# EAGLE board Sprite_Sail_60x60cm (EAGLE 9.0.0), part 1 of 2
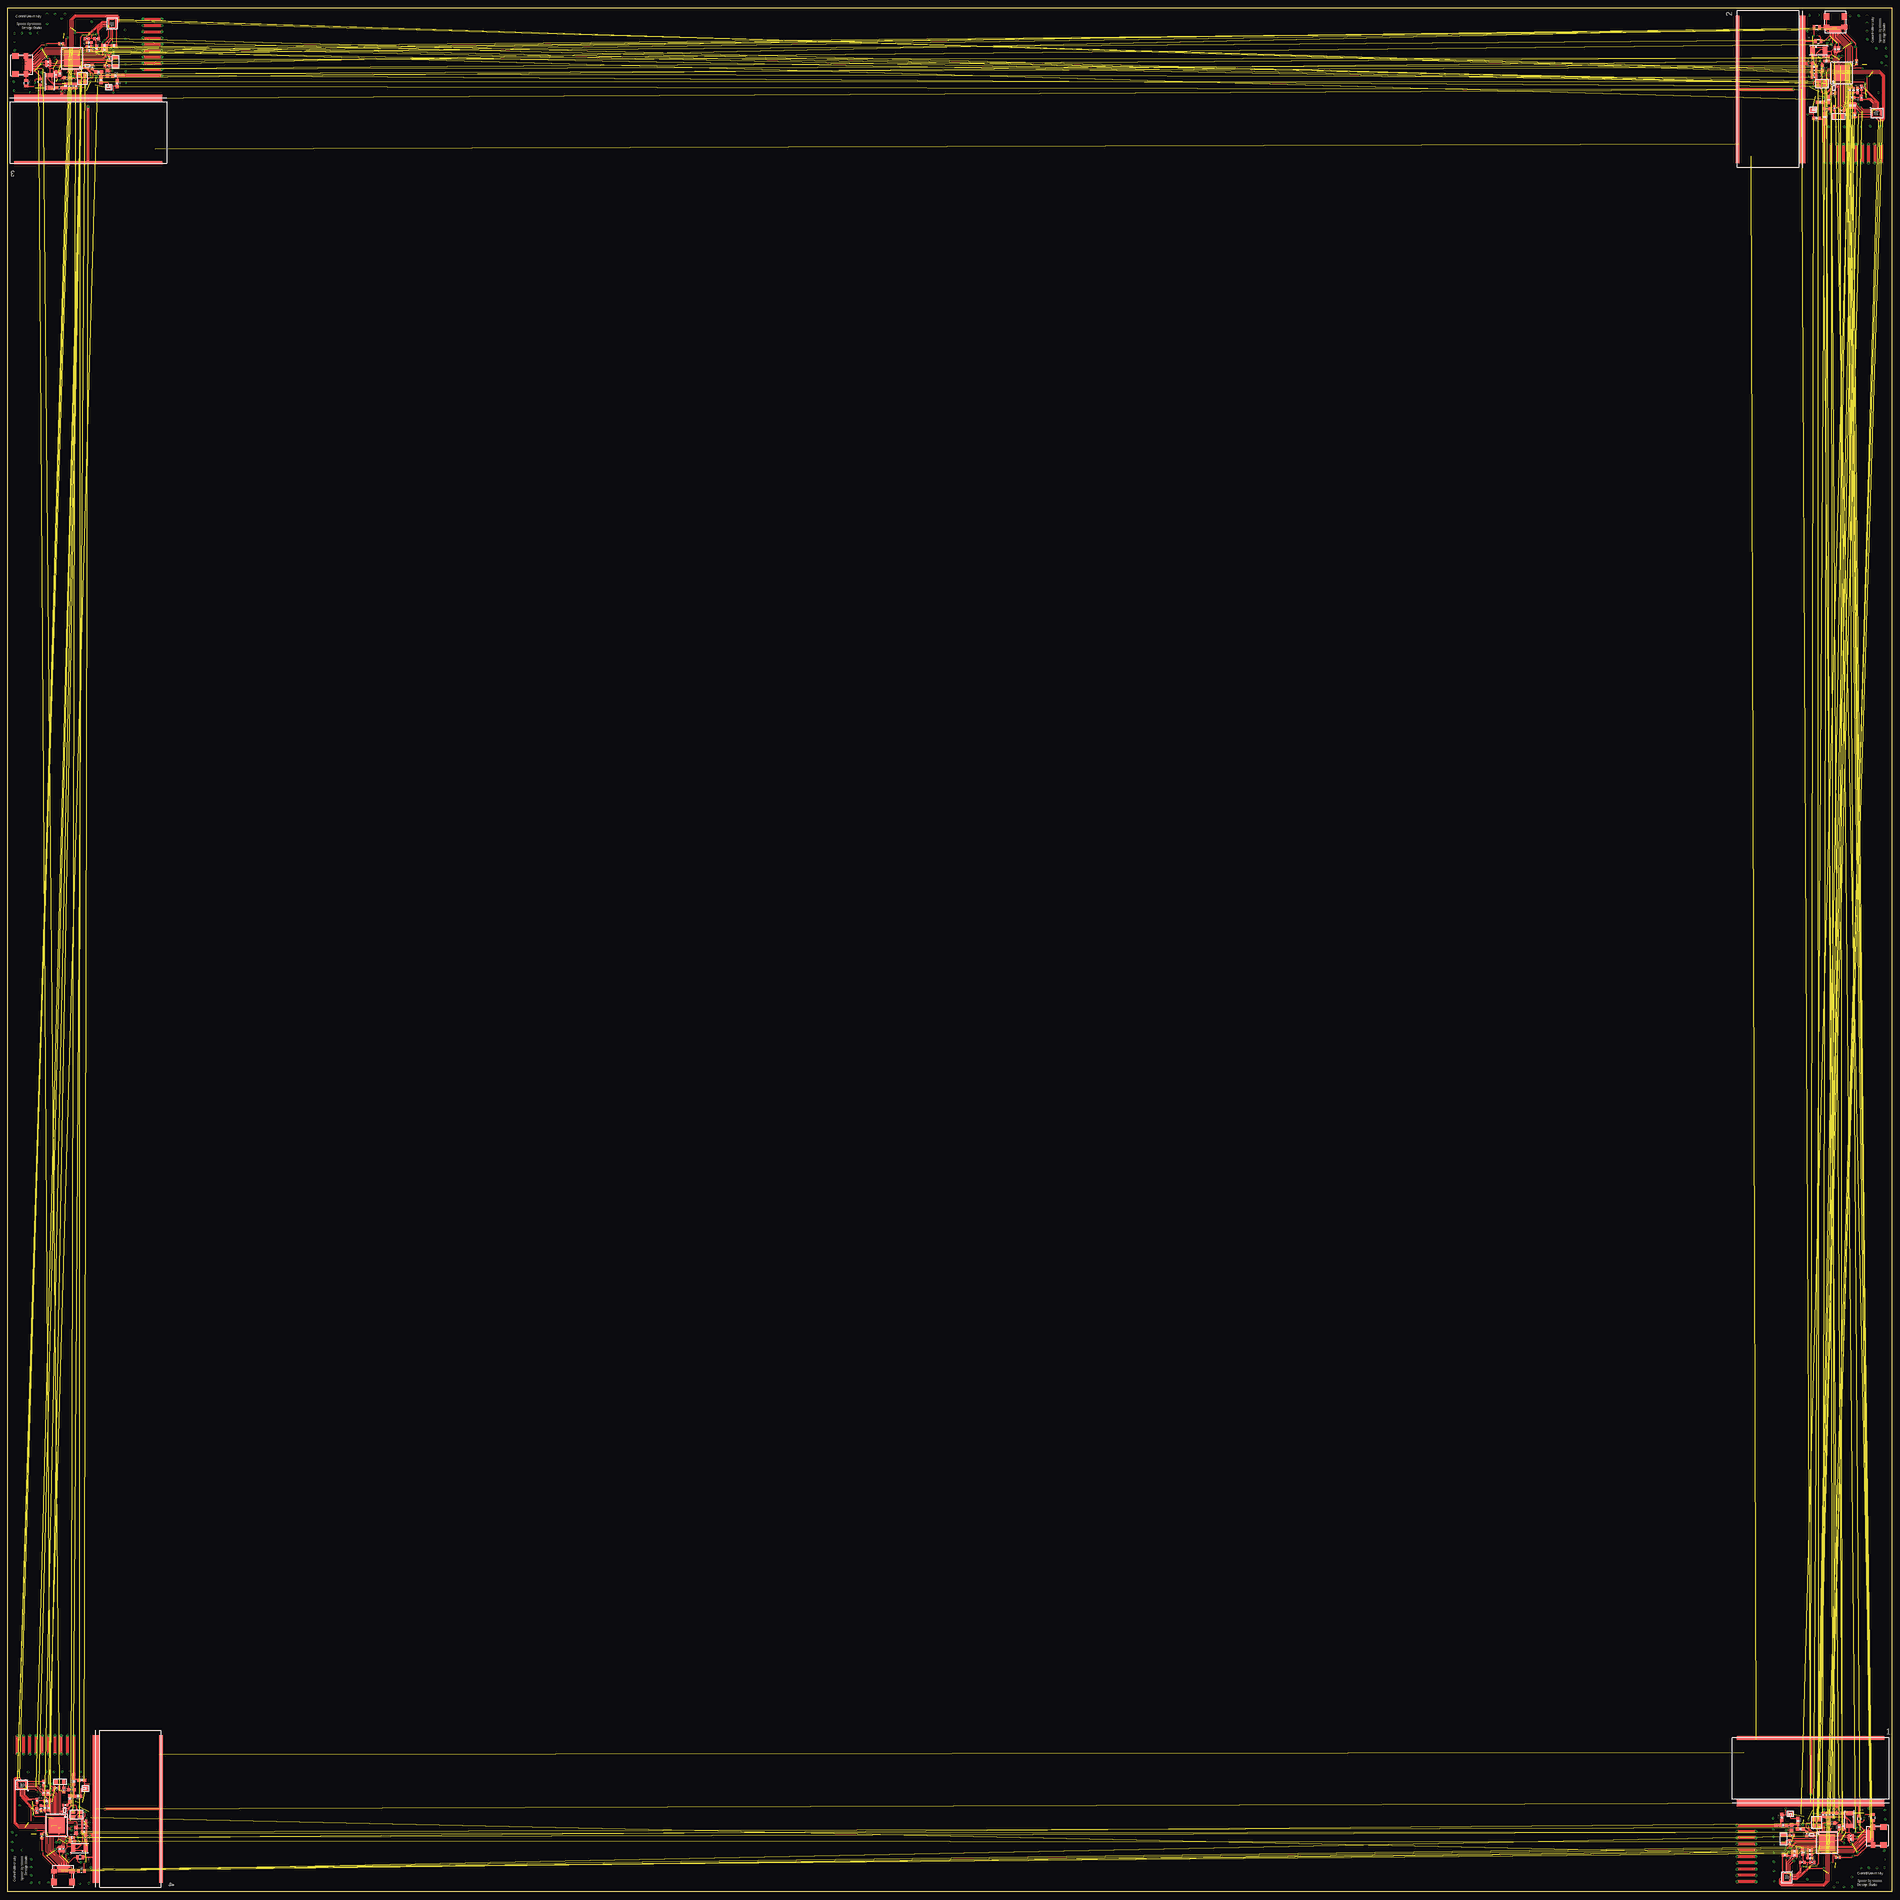
[diagram p0: board, top side]
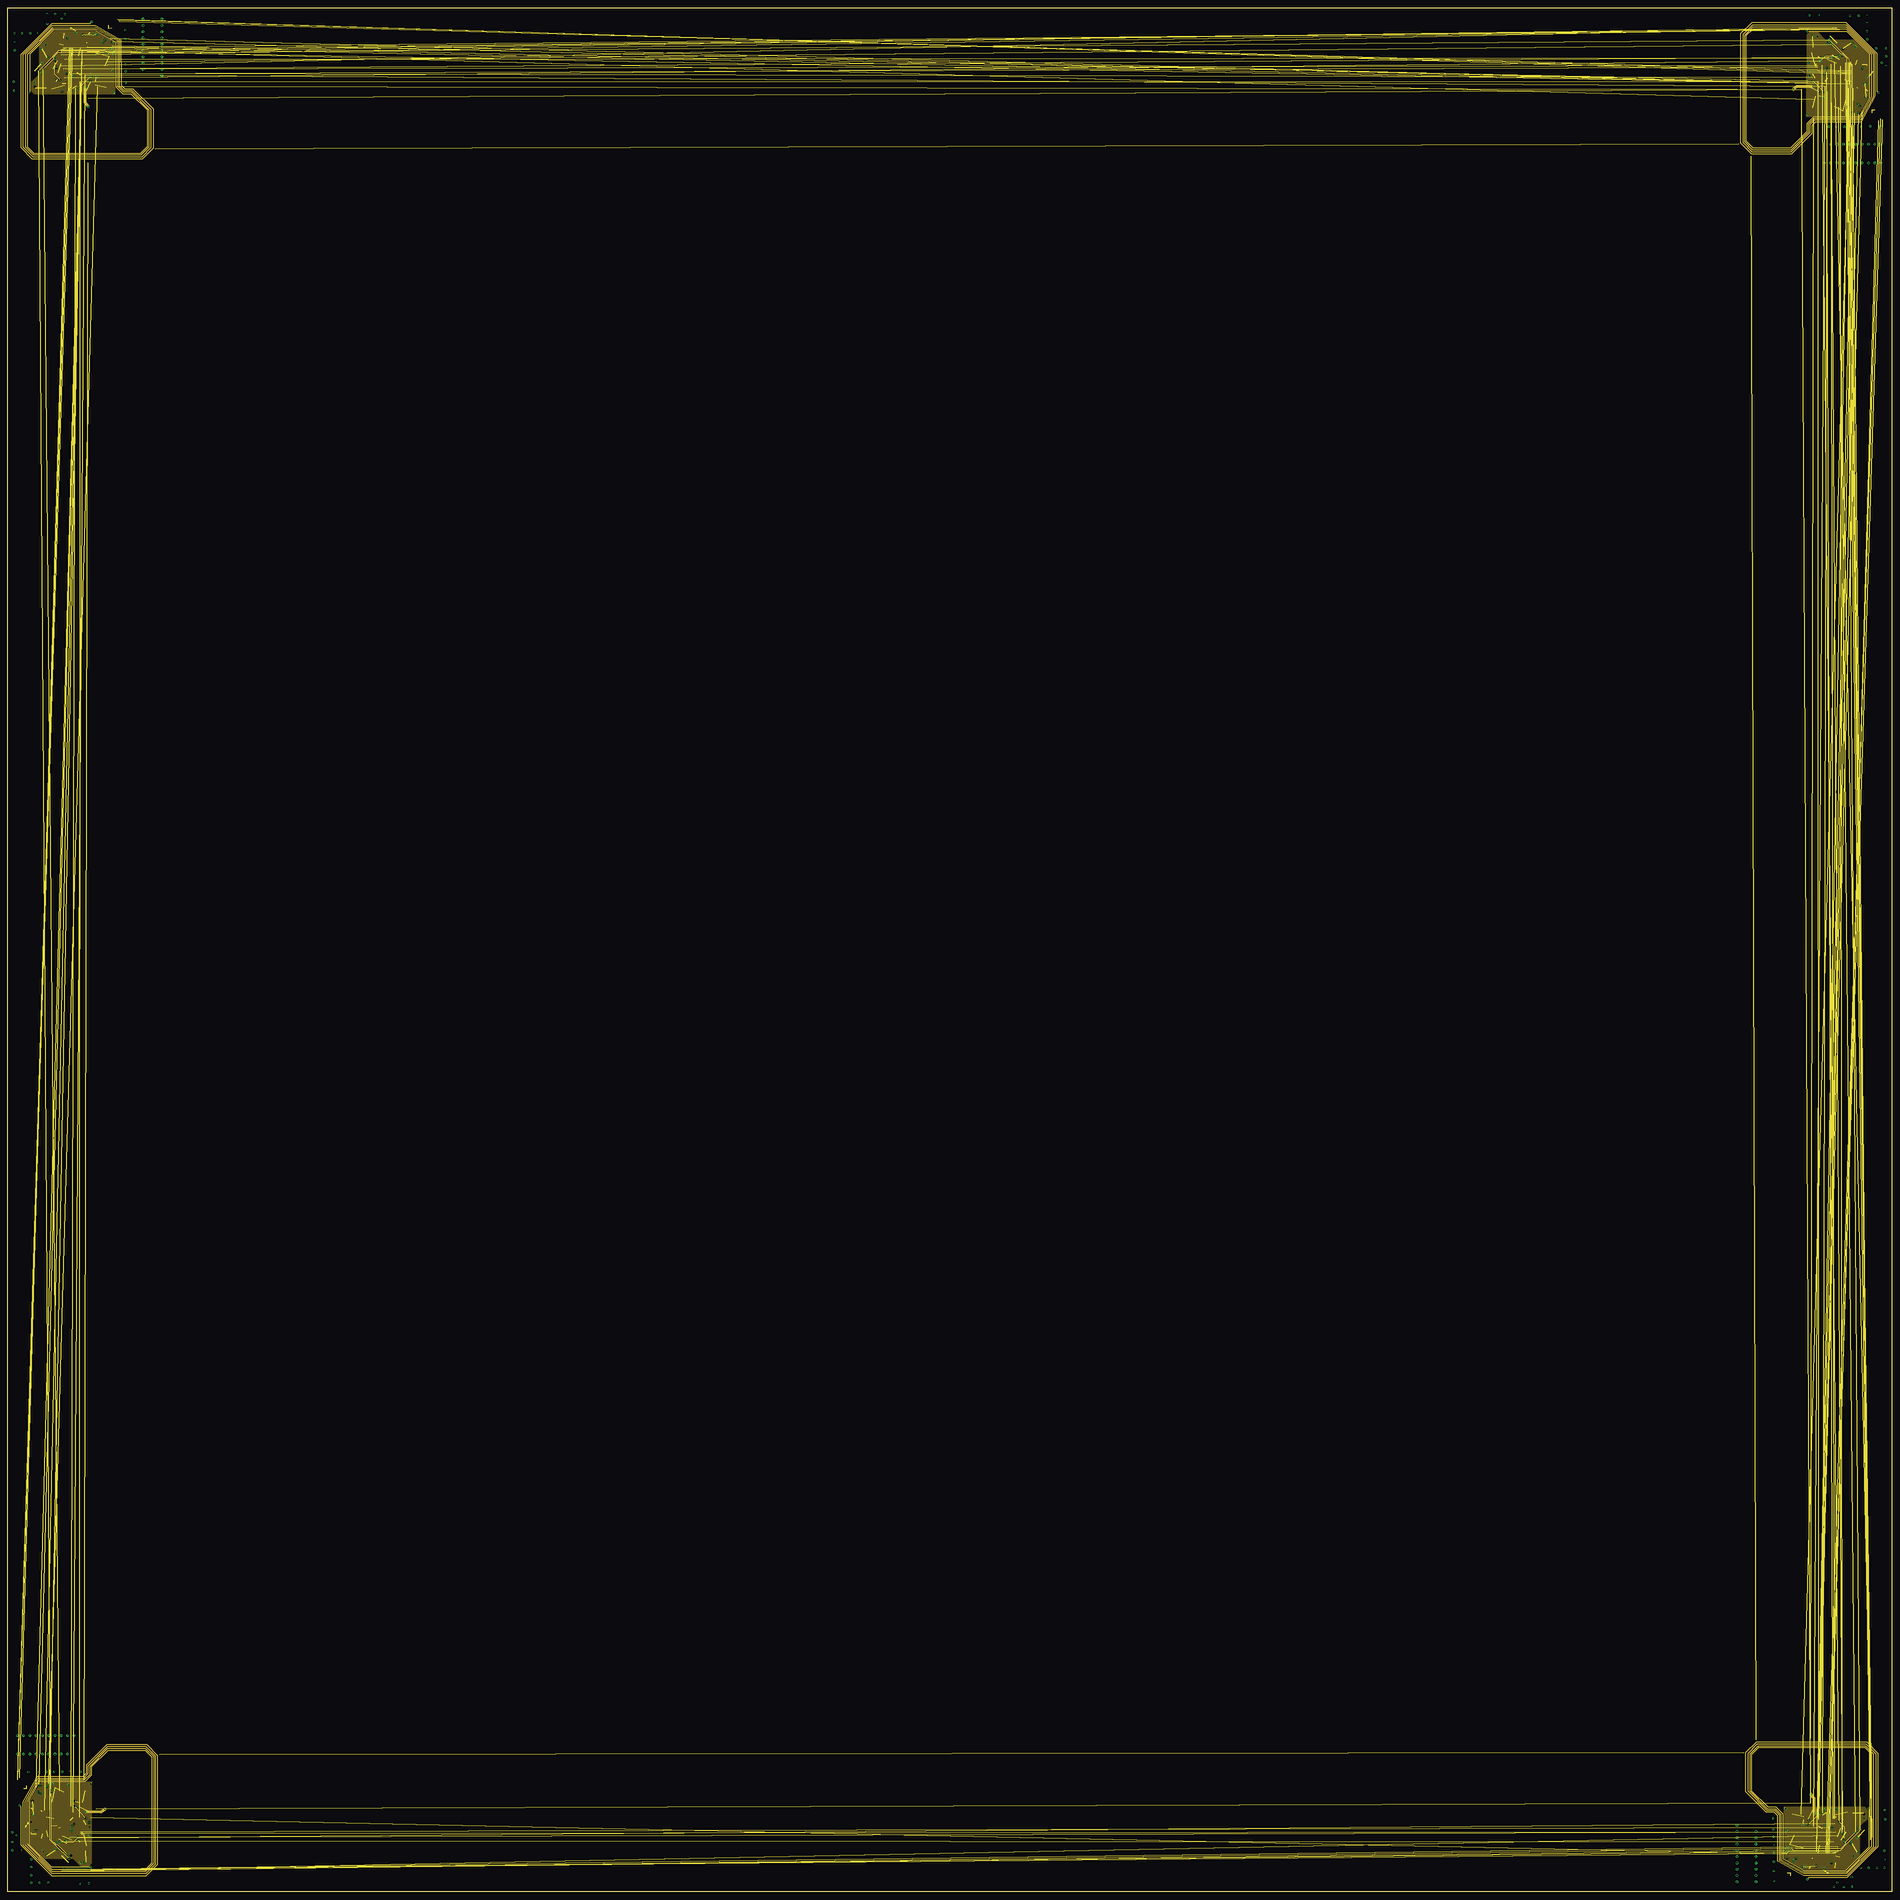
[diagram p1: board, inner layer Route2]
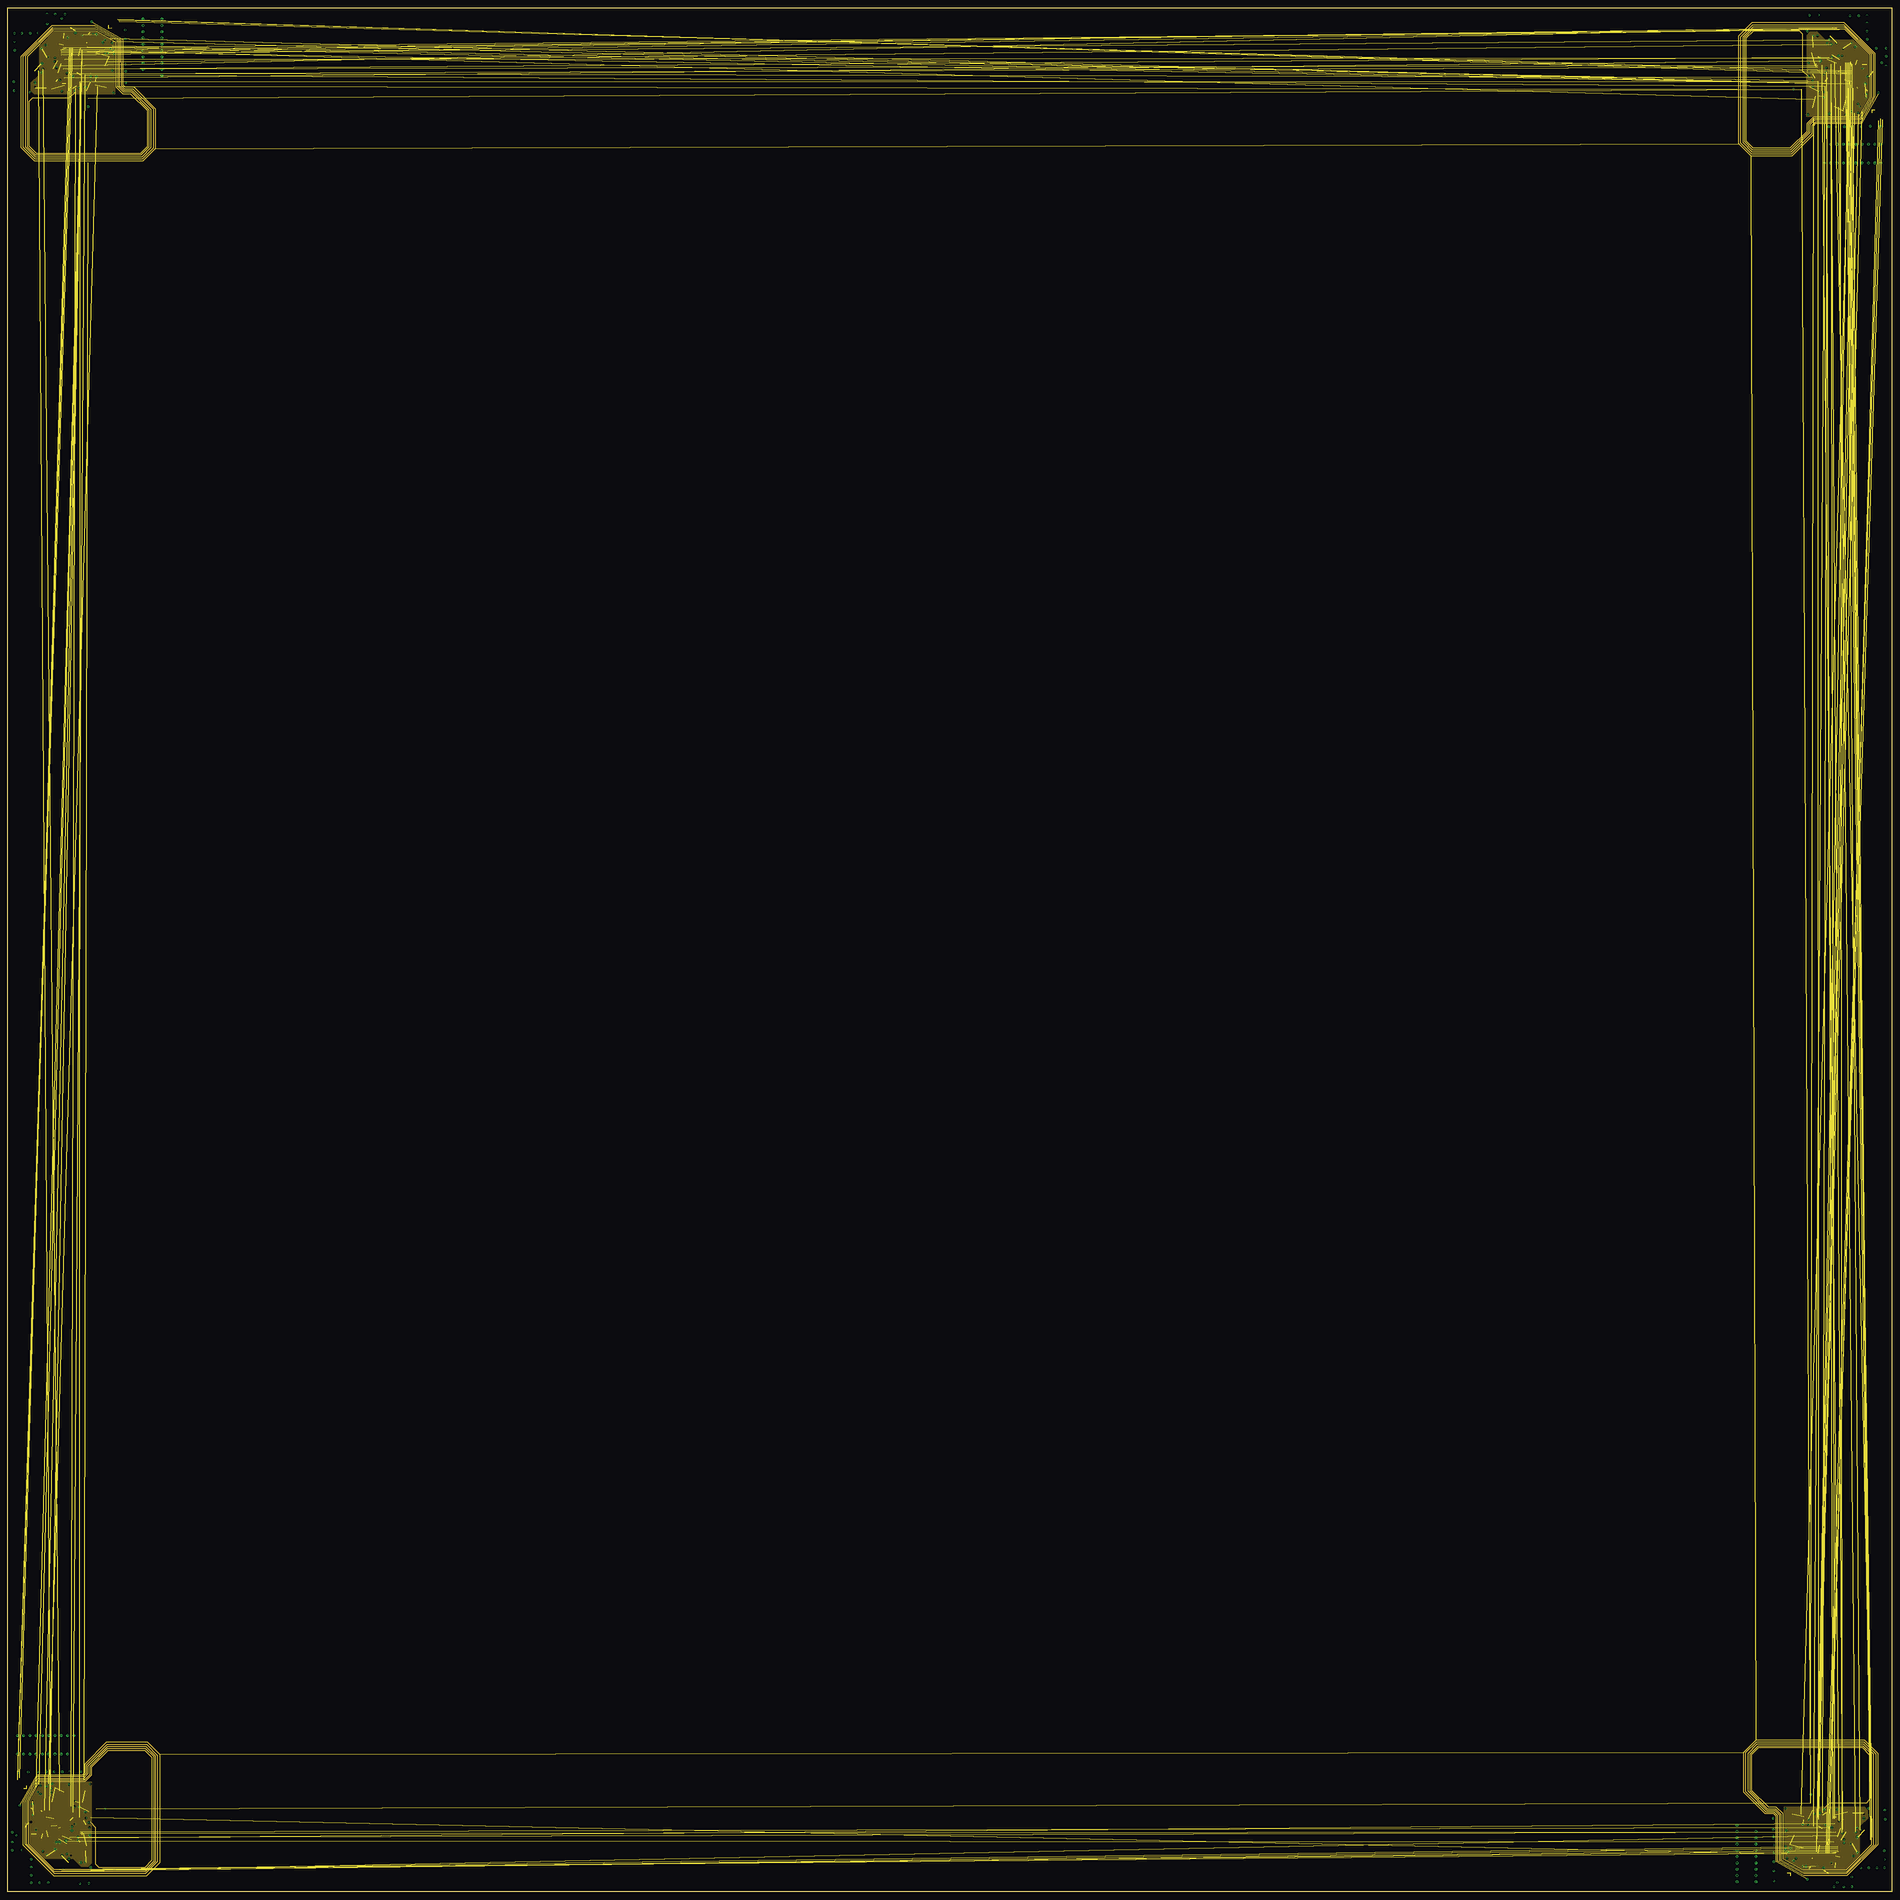
[diagram p2: board, inner layer Route15]
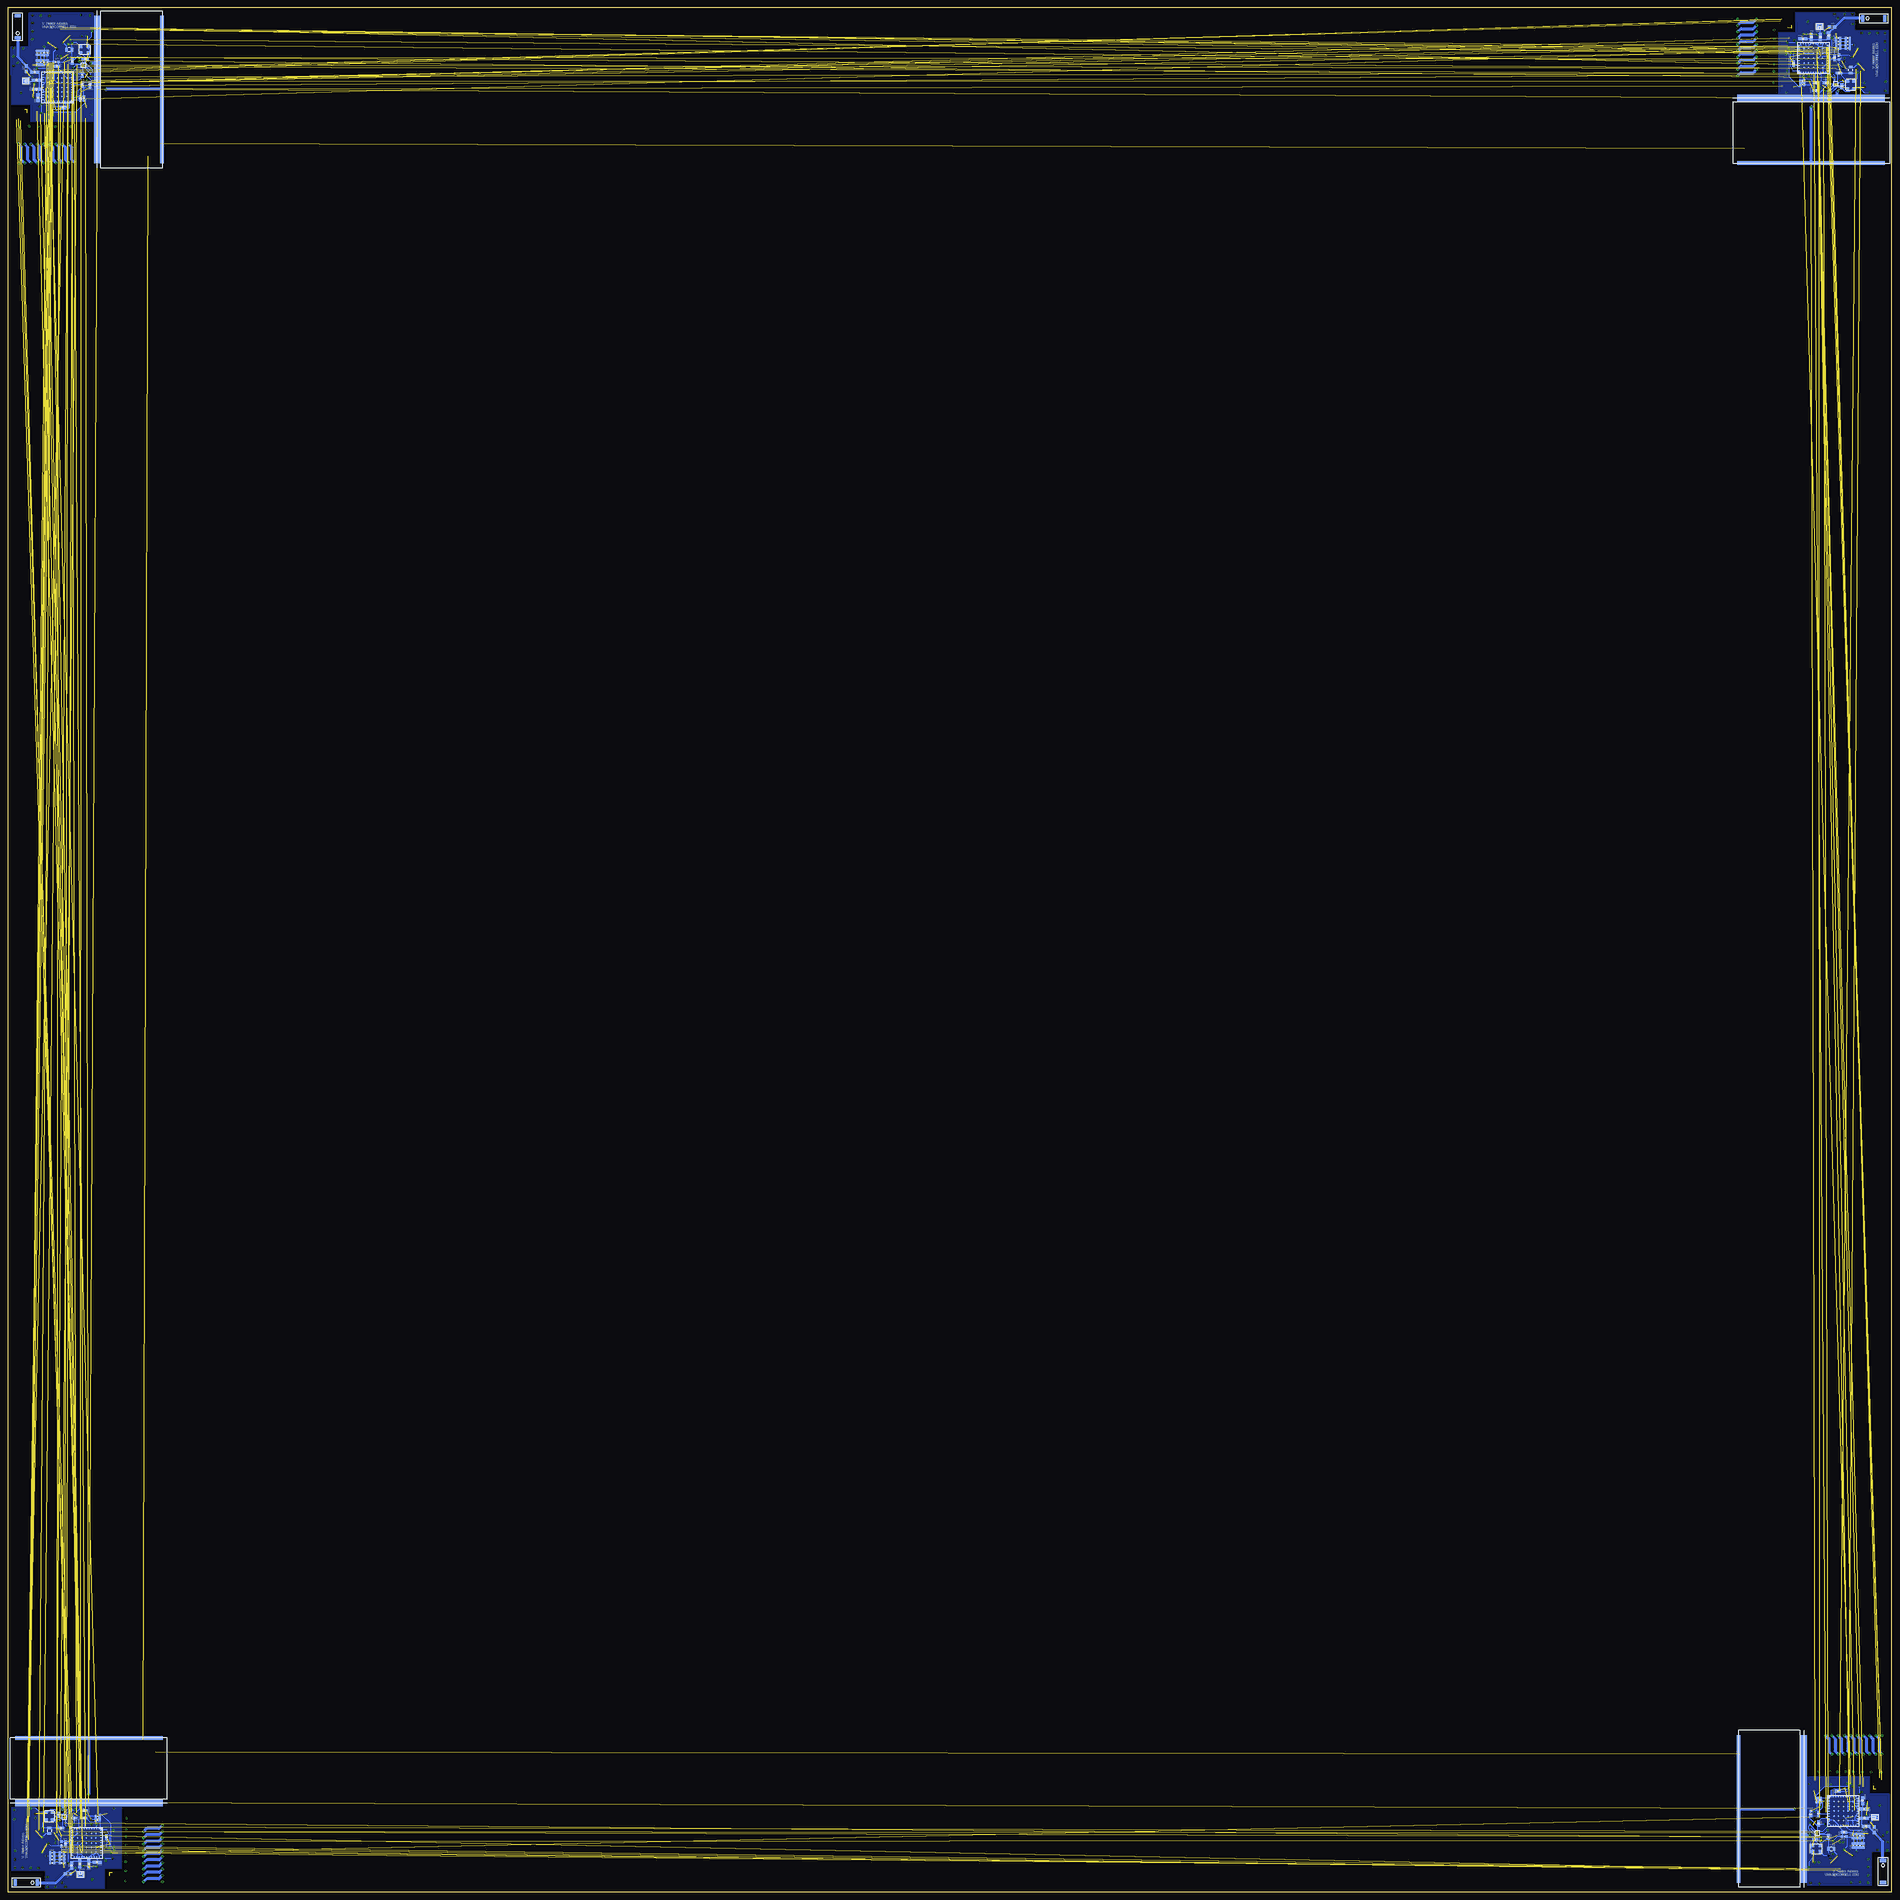
[diagram p3: board, bottom side, seen from below]

Size 600 x 600 mm. Coordinates in mm from the lower left corner, seen from the top.
Outline: 0,600 600,600 600,0 0,0 0,600
Copper layers (1*2*15*16): Top 0.035559375mm / dielectric 0.17018125mm / Route2 0.01778125mm / dielectric 47mil / Route15 0.01778125mm / dielectric 0.17018125mm / Bottom 0.035559375mm
Design rules "oshpark-4layer": minimum track width 5mil, minimum drill 10mil, track to track 5mil, track to pad 5mil, pad to pad 5mil, via to via 5mil, smd to smd 5mil, copper to edge 15mil, drill to drill 6mil, minimum pad ring 4mil, minimum via ring 4mil, stop-mask expansion 2.5mil, vias tented up to drill 0mil, thermal gap 10mil

## Footprints (pad centres in the part's own frame; a part is rotated, then mirrored left to right if it is on the bottom)
FC-135 = smd 1 x 1.8: P1 -1.25,0; P2 1.25,0
JOHANSON_BALUN = smd 0.45 x 0.25: 1 -0.4,0.5; 2 -0.4,0; 3 -0.4,-0.5; 4 0.4,-0.5; 5 0.4,0; 6 0.4,0.5
0402-CAP = smd 0.7 x 0.9: 1 -0.65,0; 2 0.65,0
0603-CAP = smd 1.1 x 1: 1 -0.85,0; 2 0.85,0
0805 = smd 0.8 x 1.2: 1 -0.9,0; 2 0.9,0
ALTA_CELL = smd 47 x 2.2: + 0,10.9 | smd 47 x 1.1: - 0,-9.65
VENUS838FLPX = smd 0.7 x 0.36: 1 -4.69,4; 2 -4.69,3.2; 3 -4.69,2.4; 4 -4.69,1.6; 5 -4.69,0.8; 6 -4.69,0; 7 -4.69,-0.8; 8 -4.69,-1.6; 9 -4.69,-2.4; 10 -4.69,-3.2; 11 -4.69,-4; 23 4.69,-4; 24 4.69,-3.2; 25 4.69,-2.4; 26 4.69,-1.6; 27 4.69,-0.8; 28 4.69,0; 29 4.69,0.8; 30 4.69,1.6; 31 4.69,2.4; 32 4.69,3.2; 33 4.69,4 | smd 0.36 x 0.7: 12 -4,-4.69; 13 -3.2,-4.69; 14 -2.4,-4.69; 15 -1.6,-4.69; 16 -0.8,-4.69; 17 0,-4.69; 18 0.8,-4.69; 19 1.6,-4.69; 20 2.4,-4.69; 21 3.2,-4.69; 22 4,-4.69; 34 4,4.69; 35 3.2,4.69; 36 2.4,4.69; 37 1.6,4.69; 38 0.8,4.69; 39 0,4.69; 40 -0.8,4.69; 41 -1.6,4.69; 42 -2.4,4.69; 43 -3.2,4.69; 44 -4,4.69 | smd 0.6 x 0.6: 45 -3,3; 46 -3,1.5; 47 -3,0; 48 -3,-1.5; 49 -3,-3; 50 -1.5,3; 51 -1.5,1.5; 52 -1.5,0; 53 -1.5,-1.5; 54 -1.5,-3; 55 0,3; 56 0,1.5; 57 0,0; 58 0,-1.5; 59 0,-3; 60 1.5,3; 61 1.5,1.5; 62 1.5,0; 63 1.5,-1.5; 64 1.5,-3; 65 3,3; 66 3,1.5; 67 3,0; 68 3,-1.5; 69 3,-3
LGA24-8X4 = smd 0.27 x 0.45: 1 -1.505,1.225; 6 -1.505,-1.225; 7 -1.075,-1.225; 8 -0.645,-1.225; 9 -0.215,-1.225; 10 0.215,-1.225; 11 0.645,-1.225; 12 1.075,-1.225; 13 1.505,-1.225; 18 1.505,1.225; 19 1.075,1.225; 20 0.645,1.225; 21 0.215,1.225; 22 -0.215,1.225; 23 -0.645,1.225; 24 -1.075,1.225 | smd 0.45 x 0.27: 2 -1.475,0.645; 3 -1.475,0.215; 4 -1.475,-0.215; 5 -1.475,-0.645; 14 1.475,-0.645; 15 1.475,-0.215; 16 1.475,0.215; 17 1.475,0.645
0603 = smd 1.1 x 1: 1 -0.85,0; 2 0.85,0
LED-0603 = smd 0.8 x 0.8: A 0,-0.75; C 0,0.75
ALS-PT19 = smd 0.8 x 0.8: C -0.75,0; E 0.75,0
CC1310 = smd 0.7 x 0.3: 1 -3.35,2.75; 2 -3.35,2.25; 3 -3.35,1.75; 4 -3.35,1.25; 5 -3.35,0.75; 6 -3.35,0.25; 7 -3.35,-0.25; 8 -3.35,-0.75; 9 -3.35,-1.25; 10 -3.35,-1.75; 11 -3.35,-2.25; 12 -3.35,-2.75; 25 3.35,-2.75; 26 3.35,-2.25; 27 3.35,-1.75; 28 3.35,-1.25; 29 3.35,-0.75; 30 3.35,-0.25; 31 3.35,0.25; 32 3.35,0.75; 33 3.35,1.25; 34 3.35,1.75; 35 3.35,2.25; 36 3.35,2.75 | smd 0.3 x 0.7: 13 -2.75,-3.35; 14 -2.25,-3.35; 15 -1.75,-3.35; 16 -1.25,-3.35; 17 -0.75,-3.35; 18 -0.25,-3.35; 19 0.25,-3.35; 20 0.75,-3.35; 21 1.25,-3.35; 22 1.75,-3.35; 23 2.25,-3.35; 24 2.75,-3.35; 37 2.75,3.35; 38 2.25,3.35; 39 1.75,3.35; 40 1.25,3.35; 41 0.75,3.35; 42 0.25,3.35; 43 -0.25,3.35; 44 -0.75,3.35; 45 -1.25,3.35; 46 -1.75,3.35; 47 -2.25,3.35; 48 -2.75,3.35 | smd 5.15 x 5.15: 49 0,0
0402-RES = smd 0.7 x 0.9: 1 -0.65,0; 2 0.65,0
0603-RES = smd 1.1 x 1: 1 -0.85,0; 2 0.85,0
TSX-3225 = smd 1.4 x 1.15: 1 -1.1,0.8; 2 1.1,0.8; 3 1.1,-0.8; 4 -1.1,-0.8
LV8417CS = smd 0.27 x 0.27: ENA -0.5,-0.5; IN1 0,-0.5; IN2 0.5,-0.5; OUT1 -0.5,0.5; OUT2 0.5,0.5; PGND 0,0.5; SGND 0,0; VCC -0.5,0; VM 0.5,0
JOHANSON_GPS_CHIP = smd 1 x 2: NC -3.5,0; SIG 3.5,0
PANASONIC_RECTIFIER = smd 1 x 1: C1 -0.95,1.2; C2 0.95,-1.2; GND 0.95,1.2; VCC -0.95,-1.2
PCB_ANTENNA = drill 0.35 pad 0.756: 1 -8.89,3.11; 2 -6.89,-2.89; 3 -6.89,3.11; 4 -4.89,-2.89; 5 -4.89,3.11; 6 -2.89,-2.89; 7 -2.89,3.11; 8 -0.89,-2.89; 9 -0.89,3.11; 10 1.11,-2.89; 11 1.11,3.11; 12 3.11,-2.89; 13 3.11,3.11; 14 5.11,-2.89; 15 5.11,3.11; 16 7.11,-2.89; 17 7.11,3.11; 18 9.11,-2.89; 19 9.11,3.11 | smd 1 x 1 bottom: ANTENNA -8.89,-9.39
MM5829-2700 = smd 0.4 x 1.7: GND1 -0.7,0; GND3 0.7,0 | smd 0.4 x 0.4: GND2 0,0.65 | smd 0.4 x 0.85: SIG 0,-0.425
L6920 = smd 0.45 x 1.35: 1 -0.975,-1.975; 2 -0.325,-1.975; 3 0.325,-1.975; 4 0.975,-1.975; 5 0.975,1.975; 6 0.325,1.975; 7 -0.325,1.975; 8 -0.975,1.975
HDMID = smd 0.23 x 0.85: 1 1.8,6.475; 3 1.4,6.475; 5 1,6.475; 7 0.6,6.475; 9 0.2,6.475; 11 -0.2,6.475; 13 -0.6,6.475; 15 -1,6.475; 17 -1.4,6.475; 19 -1.8,6.475 | smd 0.23 x 1: 2 1.6,5.25; 4 1.2,5.25; 6 0.8,5.25; 8 0.4,5.25; 10 0,5.25; 12 -0.4,5.25; 14 -0.8,5.25; 16 -1.2,5.25; 18 -1.6,5.25 | smd 1.8 x 1.38: FOOT1 -2.85,5.06; FOOT2 2.85,5.06 | smd 1.7 x 2: FOOT3 -2.85,1.7; FOOT4 2.85,1.7

## Placement (x,y rotation side)
32.1  FC-135  [FC-135]  565.58,16.7 90 top
32.2  FC-135  [FC-135]  34.25,582.84 270 top
32.3  FC-135  [FC-135]  583.06,565.39 180 top
32.5  FC-135  [FC-135]  16.57,34.97 0 top
BALUN1  JOHANSON_BALUN  [JOHANSON_BALUN]  574.54,18.13 90 top
BALUN2  JOHANSON_BALUN  [JOHANSON_BALUN]  25.29,581.41 270 top
BALUN3  JOHANSON_BALUN  [JOHANSON_BALUN]  581.63,574.35 180 top
BALUN5  JOHANSON_BALUN  [JOHANSON_BALUN]  18,26.01 0 top
C21  100 nF  [0402-CAP]  586.95,17.79 0 top
C24  100 nF  [0402-CAP]  585.83,12.37 180 bottom
C25  100 nF  [0402-CAP]  585.85,11.29 180 bottom
C27  100 nF  [0402-CAP]  585.86,10.22 180 bottom
C28  100 nF  [0402-CAP]  585.86,9.14 180 bottom
C29  22 uF  [0402-CAP]  582.81,12.38 0 bottom
C30  100 nF  [0402-CAP]  580.3,24.46 90 top
C31  22 uF  [0402-CAP]  579.2,24.45 90 top
C32  100 nF  [0402-CAP]  578.14,24.45 270 top
C33  1 uF  [0402-CAP]  582.85,10.94 0 top
C34  12 pF  [0402-CAP]  568.22,17.97 0 top
C35  12 pF  [0402-CAP]  567.48,15.75 270 top
C36  10 uF  [0402-CAP]  582.8,11.29 0 bottom
C37  0.1 uF  [0402-CAP]  582.79,10.23 0 bottom
C38  0.1 uF  [0402-CAP]  582.77,9.14 0 bottom
C39  10 nF  [0402-CAP]  574.73,9.36 180 top
C40  0.1 uF  [0402-CAP]  571.59,9.39 0 top
C41  0.1 uF  [0402-CAP]  571.36,24 180 bottom
C42  100 pF  [0402-CAP]  572.96,18.39 270 top
C43  100pF  [0603-CAP]  565.02,23.68 270 top
C44  100 uF  [0805]  586.85,19.34 270 bottom
C45  47 uF  [0805]  589.58,23.16 270 top
C46  47 uF  [0805]  593.99,23.59 270 top
C47  100 nF  [0402-CAP]  12.87,581.75 180 top
C48  100 nF  [0402-CAP]  13.99,587.17 0 bottom
C49  100 nF  [0402-CAP]  13.98,588.25 0 bottom
C50  100 nF  [0402-CAP]  13.97,589.32 0 bottom
C51  100 nF  [0402-CAP]  13.97,590.4 0 bottom
C52  22 uF  [0402-CAP]  17.02,587.16 180 bottom
C53  100 nF  [0402-CAP]  19.53,575.08 270 top
C54  22 uF  [0402-CAP]  20.62,575.09 270 top
C55  100 nF  [0402-CAP]  21.69,575.09 90 top
C56  1 uF  [0402-CAP]  16.98,588.6 180 top
C57  12 pF  [0402-CAP]  31.61,581.57 180 top
C58  12 pF  [0402-CAP]  32.35,583.79 90 top
C59  10 uF  [0402-CAP]  17.03,588.25 180 bottom
C60  0.1 uF  [0402-CAP]  17.04,589.32 180 bottom
C61  0.1 uF  [0402-CAP]  17.05,590.4 180 bottom
C62  10 nF  [0402-CAP]  25.1,590.18 0 top
C63  0.1 uF  [0402-CAP]  28.24,590.15 180 top
C64  0.1 uF  [0402-CAP]  28.47,575.54 0 bottom
C65  100 pF  [0402-CAP]  26.87,581.15 90 top
C66  100pF  [0603-CAP]  34.81,575.86 90 top
C67  100 uF  [0805]  12.98,580.2 90 bottom
C68  47 uF  [0805]  10.25,576.38 90 top
C69  47 uF  [0805]  5.83,575.95 90 top
C70  100 nF  [0402-CAP]  581.97,586.77 90 top
C71  100 nF  [0402-CAP]  587.39,585.65 90 bottom
C72  100 nF  [0402-CAP]  588.47,585.66 90 bottom
C73  100 nF  [0402-CAP]  589.55,585.67 90 bottom
C74  100 nF  [0402-CAP]  590.62,585.67 90 bottom
C75  22 uF  [0402-CAP]  587.38,582.62 270 bottom
C76  100 nF  [0402-CAP]  575.3,580.11 180 top
C77  22 uF  [0402-CAP]  575.31,579.02 180 top
C78  100 nF  [0402-CAP]  575.31,577.95 0 top
C79  1 uF  [0402-CAP]  588.83,582.66 90 top
C80  12 pF  [0402-CAP]  581.79,568.03 90 top
C81  12 pF  [0402-CAP]  584.01,567.29 0 top
C82  10 uF  [0402-CAP]  588.47,582.61 270 bottom
C83  0.1 uF  [0402-CAP]  589.54,582.6 270 bottom
C84  0.1 uF  [0402-CAP]  590.62,582.59 270 bottom
C85  10 nF  [0402-CAP]  590.4,574.54 270 top
C86  0.1 uF  [0402-CAP]  590.37,571.4 90 top
C87  0.1 uF  [0402-CAP]  575.76,571.17 90 bottom
C88  100 pF  [0402-CAP]  581.37,572.77 0 top
C89  100pF  [0603-CAP]  576.09,564.83 0 top
C90  100 uF  [0805]  580.42,586.66 180 bottom
C91  47 uF  [0805]  576.6,589.39 0 top
C92  47 uF  [0805]  576.17,593.81 0 top
C116  100 nF  [0402-CAP]  17.66,13.59 270 top
C117  100 nF  [0402-CAP]  12.24,14.71 270 bottom
C118  100 nF  [0402-CAP]  11.16,14.7 270 bottom
C119  100 nF  [0402-CAP]  10.08,14.69 270 bottom
C120  100 nF  [0402-CAP]  9.01,14.69 270 bottom
C121  22 uF  [0402-CAP]  12.25,17.74 90 bottom
C122  100 nF  [0402-CAP]  24.33,20.24 0 top
C123  22 uF  [0402-CAP]  24.32,21.34 0 top
C124  100 nF  [0402-CAP]  24.32,22.41 180 top
C125  1 uF  [0402-CAP]  10.8,17.7 270 top
C126  12 pF  [0402-CAP]  17.84,32.33 270 top
C127  12 pF  [0402-CAP]  15.62,33.07 180 top
C128  10 uF  [0402-CAP]  11.16,17.75 90 bottom
C129  0.1 uF  [0402-CAP]  10.09,17.76 90 bottom
C130  0.1 uF  [0402-CAP]  9.01,17.77 90 bottom
C131  10 nF  [0402-CAP]  9.23,25.82 90 top
C132  0.1 uF  [0402-CAP]  9.26,28.96 270 top
C133  0.1 uF  [0402-CAP]  23.87,29.19 270 bottom
C134  100 pF  [0402-CAP]  18.26,27.59 180 top
C135  100pF  [0603-CAP]  23.54,35.53 180 top
C136  100 uF  [0805]  19.21,13.7 0 bottom
C137  47 uF  [0805]  23.03,10.96 180 top
C138  47 uF  [0805]  23.46,6.55 180 top
FRONT_PANEL1  ALTA_CELL  [ALTA_CELL]  574.2,39.22 180 bottom
FRONT_PANEL2  ALTA_CELL  [ALTA_CELL]  25.63,560.32 0 bottom
FRONT_PANEL3  ALTA_CELL  [ALTA_CELL]  560.54,574.01 90 bottom
FRONT_PANEL5  ALTA_CELL  [ALTA_CELL]  39.09,26.35 270 bottom
GPS1  VENUS838FLPX  [VENUS838FLPX]  574.89,15.54 270 bottom
GPS2  VENUS838FLPX  [VENUS838FLPX]  24.94,584 90 bottom
GPS3  VENUS838FLPX  [VENUS838FLPX]  584.22,574.7 180 bottom
GPS5  VENUS838FLPX  [VENUS838FLPX]  15.41,25.66 0 bottom
IMU1  LSM9DS1  [LGA24-8X4]  566.57,4.48 270 top
IMU2  LSM9DS1  [LGA24-8X4]  33.26,595.06 90 top
IMU3  LSM9DS1  [LGA24-8X4]  595.28,566.38 0 top
IMU5  LSM9DS1  [LGA24-8X4]  4.35,33.98 180 top
L5  6.8 uH  [0603]  581.02,21.84 180 top
L6  DNP  [0603]  568.1,20.39 270 top
L7  2.2 nH  [0603]  580.83,5.64 180 bottom
L8  47uH  [0603]  583.47,24.93 180 top
L9  6.8 uH  [0603]  18.8,577.7 0 top
L10  DNP  [0603]  31.73,579.16 90 top
L11  2.2 nH  [0603]  19,593.9 0 bottom
L12  47uH  [0603]  16.36,574.61 0 top
L13  6.8 uH  [0603]  577.92,580.83 270 top
L14  DNP  [0603]  579.38,567.91 0 top
L15  2.2 nH  [0603]  594.12,580.64 90 bottom
L16  47uH  [0603]  574.83,583.28 270 top
L21  6.8 uH  [0603]  21.71,19.52 90 top
L22  DNP  [0603]  20.25,32.45 180 top
L23  2.2 nH  [0603]  5.51,19.72 270 bottom
L24  47uH  [0603]  24.8,17.08 90 top
LED4  RED  [LED-0603]  571.65,12.51 180 top
LED5  GREEN  [LED-0603]  573.91,10.64 270 top
LED6  BLUE  [LED-0603]  575.66,25.87 90 bottom
LED7  RED  [LED-0603]  28.18,587.03 0 top
LED8  GREEN  [LED-0603]  25.92,588.9 90 top
LED9  BLUE  [LED-0603]  24.17,573.67 270 bottom
LED10  RED  [LED-0603]  587.25,571.46 270 top
LED11  GREEN  [LED-0603]  589.12,573.72 0 top
LED12  BLUE  [LED-0603]  573.89,575.47 0 bottom
LED16  RED  [LED-0603]  12.38,28.9 90 top
LED17  GREEN  [LED-0603]  10.51,26.64 180 top
LED18  BLUE  [LED-0603]  25.74,24.89 180 bottom
LS3  LIGHTSENSORALS  [ALS-PT19]  582.99,15.19 90 bottom
LS4  LIGHTSENSORALS  [ALS-PT19]  584.48,20.6 270 top
LS5  LIGHTSENSORALS  [ALS-PT19]  16.84,584.35 270 bottom
LS6  LIGHTSENSORALS  [ALS-PT19]  15.34,578.94 90 top
LS7  LIGHTSENSORALS  [ALS-PT19]  584.57,582.8 0 bottom
LS8  LIGHTSENSORALS  [ALS-PT19]  579.16,584.3 0 top
LS11  LIGHTSENSORALS  [ALS-PT19]  15.06,17.56 180 bottom
LS12  LIGHTSENSORALS  [ALS-PT19]  20.47,16.06 180 top
MICROCONTROLLER1  CC1310  [CC1310]  579.43,15.66 0 top
MICROCONTROLLER2  CC1310  [CC1310]  20.4,583.88 180 top
MICROCONTROLLER3  CC1310  [CC1310]  584.1,579.24 90 top
MICROCONTROLLER5  CC1310  [CC1310]  15.53,21.12 270 top
R23  100k  [0402-RES]  586.98,16.69 180 top
R24  3.3k  [0402-RES]  569.07,12.86 180 top
R25  3.3k  [0402-RES]  569.06,11.56 180 top
R26  180  [0402-RES]  573.92,13.13 0 top
R27  180  [0402-RES]  573.95,11.92 0 top
R28  10k  [0402-RES]  565.99,11.55 180 top
R29  10k  [0402-RES]  581.64,15.31 270 bottom
R30  10k  [0402-RES]  583.27,20.49 90 top
R31  10k  [0402-RES]  568.57,17.3 270 bottom
R32  180  [0402-RES]  575.77,23.45 180 bottom
R33  1k  [0402-RES]  578.87,23.44 180 bottom
R34  10k  [0402-RES]  571.36,22.87 0 bottom
R35  3.3k  [0402-RES]  583.1,20.29 180 bottom
R36  331  [0402-RES]  583.99,24.49 90 bottom
R37  0  [0603-RES]  570.92,19.93 180 top
R38  0  [0603-RES]  571.56,9.37 0 bottom
R39  0  [0603-RES]  565.49,21.16 180 top
R40  0  [0603-RES]  579.71,8.33 90 bottom
R41  DNP  [0603-RES]  574.25,8.85 270 bottom
R42  10k  [0402-RES]  581.44,24.45 90 top
R43  0  [0603-RES]  570.15,22.49 270 top
R44  0  [0603-RES]  577.12,8.84 270 bottom
R45  100k  [0402-RES]  12.85,582.85 0 top
R46  3.3k  [0402-RES]  30.76,586.68 0 top
R47  3.3k  [0402-RES]  30.77,587.98 0 top
R48  180  [0402-RES]  25.91,586.41 180 top
R49  180  [0402-RES]  25.88,587.62 180 top
R50  10k  [0402-RES]  33.84,587.99 0 top
R51  10k  [0402-RES]  18.19,584.23 90 bottom
R52  10k  [0402-RES]  16.55,579.05 270 top
R53  10k  [0402-RES]  31.26,582.24 90 bottom
R54  180  [0402-RES]  24.06,576.09 0 bottom
R55  1k  [0402-RES]  20.96,576.1 0 bottom
R56  10k  [0402-RES]  28.47,576.67 180 bottom
R57  3.3k  [0402-RES]  16.73,579.25 0 bottom
R58  331  [0402-RES]  15.84,575.05 270 bottom
R59  0  [0603-RES]  28.9,579.61 0 top
R60  0  [0603-RES]  28.27,590.17 180 bottom
R61  0  [0603-RES]  34.34,578.38 0 top
R62  0  [0603-RES]  20.12,591.22 270 bottom
R63  DNP  [0603-RES]  25.58,590.69 90 bottom
R64  10k  [0402-RES]  18.39,575.09 270 top
R65  0  [0603-RES]  29.68,577.05 90 top
R66  0  [0603-RES]  22.71,590.7 90 bottom
R67  100k  [0402-RES]  583.07,586.79 270 top
R68  3.3k  [0402-RES]  586.9,568.88 270 top
R69  3.3k  [0402-RES]  588.2,568.87 270 top
R70  180  [0402-RES]  586.63,573.73 90 top
R71  180  [0402-RES]  587.84,573.76 90 top
R72  10k  [0402-RES]  588.21,565.8 270 top
R73  10k  [0402-RES]  584.45,581.45 180 bottom
R74  10k  [0402-RES]  579.28,583.09 180 top
R75  10k  [0402-RES]  582.46,568.38 180 bottom
R76  180  [0402-RES]  576.31,575.58 90 bottom
R77  1k  [0402-RES]  576.32,578.68 90 bottom
R78  10k  [0402-RES]  576.89,571.17 270 bottom
R79  3.3k  [0402-RES]  579.47,582.91 90 bottom
R80  331  [0402-RES]  575.27,583.8 0 bottom
R81  0  [0603-RES]  579.83,570.74 270 top
R82  0  [0603-RES]  590.39,571.37 270 bottom
R83  0  [0603-RES]  578.61,565.3 270 top
R84  0  [0603-RES]  591.44,579.52 0 bottom
R85  DNP  [0603-RES]  590.91,574.06 180 bottom
R86  10k  [0402-RES]  575.31,581.25 180 top
R87  0  [0603-RES]  577.27,569.96 0 top
R88  0  [0603-RES]  590.92,576.93 180 bottom
R111  100k  [0402-RES]  16.56,13.56 90 top
R112  3.3k  [0402-RES]  12.73,31.48 90 top
R113  3.3k  [0402-RES]  11.43,31.49 90 top
R114  180  [0402-RES]  13,26.63 270 top
R115  180  [0402-RES]  11.79,26.6 270 top
R116  10k  [0402-RES]  11.42,34.56 90 top
R117  10k  [0402-RES]  15.18,18.91 0 bottom
R118  10k  [0402-RES]  20.35,17.27 0 top
R119  10k  [0402-RES]  17.17,31.98 0 bottom
R120  180  [0402-RES]  23.32,24.78 270 bottom
R121  1k  [0402-RES]  23.31,21.68 270 bottom
R122  10k  [0402-RES]  22.74,29.19 90 bottom
R123  3.3k  [0402-RES]  20.16,17.45 270 bottom
R124  331  [0402-RES]  24.36,16.55 180 bottom
R125  0  [0603-RES]  19.8,29.62 90 top
R126  0  [0603-RES]  9.24,28.99 90 bottom
R127  0  [0603-RES]  21.02,35.06 90 top
R128  0  [0603-RES]  8.19,20.84 180 bottom
R129  DNP  [0603-RES]  8.72,26.3 0 bottom
R130  10k  [0402-RES]  24.32,19.1 0 top
R131  0  [0603-RES]  22.36,30.39 180 top
R132  0  [0603-RES]  8.71,23.42 0 bottom
REAR_PANEL1  ALTA_CELL  [ALTA_CELL]  574.22,39.21 180 top
REAR_PANEL2  ALTA_CELL  [ALTA_CELL]  25.61,560.33 0 top
REAR_PANEL3  ALTA_CELL  [ALTA_CELL]  560.55,574.03 270 top
REAR_PANEL5  ALTA_CELL  [ALTA_CELL]  39.08,26.32 90 top
TSX1  TSX-3225  [TSX-3225]  576.02,21.98 90 top
TSX2  TSX-3225  [TSX-3225]  23.81,577.56 270 top
TSX3  TSX-3225  [TSX-3225]  577.78,575.83 180 top
TSX5  TSX-3225  [TSX-3225]  21.85,24.53 0 top
U$1  LV8417CS  [LV8417CS]  581.94,23.76 0 bottom
U$10  JOHANSON_GPS_CHIP  [JOHANSON_GPS_CHIP]  594.15,2.89 0 bottom
U$11  PANASONIC_RECTIFIER  [PANASONIC_RECTIFIER]  586.83,24.11 0 bottom
U$12  PCB_ANTENNA  [PCB_ANTENNA]  553.88,12.26 270 bottom
U$13  MM5329-2700  [MM5829-2700]  567.73,24.82 0 top
U$14  MM5329-2700  [MM5829-2700]  576.89,5.46 180 bottom
U$15  L6920  [L6920]  586.62,22.97 180 top
U$16  HDMID  [HDMID]  599.13,17.7 90 top
U$17  LV8417CS  [LV8417CS]  17.89,575.78 180 bottom
U$18  JOHANSON_GPS_CHIP  [JOHANSON_GPS_CHIP]  5.68,596.65 180 bottom
U$19  PANASONIC_RECTIFIER  [PANASONIC_RECTIFIER]  13,575.43 180 bottom
U$20  PCB_ANTENNA  [PCB_ANTENNA]  45.95,587.28 90 bottom
U$21  MM5329-2700  [MM5829-2700]  32.1,574.73 180 top
U$22  MM5329-2700  [MM5829-2700]  22.94,594.08 0 bottom
U$23  L6920  [L6920]  13.2,576.57 0 top
U$24  HDMID  [HDMID]  0.7,581.84 270 top
U$25  LV8417CS  [LV8417CS]  576,581.75 270 bottom
U$26  JOHANSON_GPS_CHIP  [JOHANSON_GPS_CHIP]  596.87,593.96 270 bottom
U$27  PANASONIC_RECTIFIER  [PANASONIC_RECTIFIER]  575.65,586.64 270 bottom
U$28  PCB_ANTENNA  [PCB_ANTENNA]  587.5,553.69 180 bottom
U$29  MM5329-2700  [MM5829-2700]  574.95,567.54 90 top
U$30  MM5329-2700  [MM5829-2700]  594.3,576.7 90 bottom
U$31  L6920  [L6920]  576.8,586.43 270 top
U$32  HDMID  [HDMID]  582.06,598.94 180 top
U$41  LV8417CS  [LV8417CS]  23.63,18.61 90 bottom
U$42  JOHANSON_GPS_CHIP  [JOHANSON_GPS_CHIP]  2.76,6.4 90 bottom
U$43  PANASONIC_RECTIFIER  [PANASONIC_RECTIFIER]  23.98,13.72 90 bottom
U$44  PCB_ANTENNA  [PCB_ANTENNA]  12.13,46.67 0 bottom
U$45  MM5329-2700  [MM5829-2700]  24.68,32.82 270 top
U$46  MM5329-2700  [MM5829-2700]  5.33,23.66 270 bottom
U$47  L6920  [L6920]  22.83,13.92 90 top
U$48  HDMID  [HDMID]  17.57,1.42 0 top

## Library data of the parts
32.1-32.3 32.5 = FC-135
BALUN1-BALUN3 BALUN5 = JOHANSON_BALUN
C21 C24 C25 C27-C92 C116-C138 L5-L16 L21-L24 LED4-LED12 LED16-LED18 R23-R88 R111-R132 = SparkFun
FRONT_PANEL1-FRONT_PANEL3 FRONT_PANEL5 REAR_PANEL1-REAR_PANEL3 REAR_PANEL5 = ALTA_CELL
GPS1-GPS3 GPS5 = VENUS838FLPX
IMU1-IMU3 IMU5 = SparkFun-Sensors; PROD_ID: IC-12536
LS3-LS8 LS11 LS12 = SparkFun-Sensors; PROD_ID: IC-11836
MICROCONTROLLER1-MICROCONTROLLER3 MICROCONTROLLER5 = CC1310RGZ48
TSX1-TSX3 TSX5 = TSX-3225
U$1 U$17 U$25 U$41 = LV8417CS
U$10 U$18 U$26 U$42 = johanson_gps_chip
U$11 U$19 U$27 U$43 = Panasonic_Rectifier
U$12 U$20 U$28 U$44 = PCB_ANTENNA
U$13 U$14 U$21 U$22 U$29 U$30 U$45 U$46 = MM5329-2700
U$15 U$23 U$31 U$47 = L6920
U$16 U$24 U$32 U$48 = HDMID

## Nets
ACCEL_INT: IMU1.12 IMU2.12 IMU3.12 IMU5.12 MICROCONTROLLER1.18 MICROCONTROLLER2.18 MICROCONTROLLER3.18 MICROCONTROLLER5.18
ADC0: LS3.E LS5.E LS7.E LS11.E MICROCONTROLLER1.36 MICROCONTROLLER2.36 MICROCONTROLLER3.36 MICROCONTROLLER5.36 R29.1 R51.1 R73.1 R117.1
ADC1: LS4.E LS6.E LS8.E LS12.E MICROCONTROLLER1.37 MICROCONTROLLER2.37 MICROCONTROLLER3.37 MICROCONTROLLER5.37 R30.1 R52.1 R74.1 R118.1
ANTENNA1: C43.2 R39.2 U$12.1 U$12.2 U$12.3 U$12.4 U$12.5 U$12.6 U$12.7 U$12.8 U$12.9 U$12.10 U$12.11 U$12.12 U$12.13 U$12.14 U$12.15 U$12.16 U$12.17 U$12.18 U$12.19 U$12.ANTENNA
ANTENNA2: C66.2 R61.2 U$20.1 U$20.2 U$20.3 U$20.4 U$20.5 U$20.6 U$20.7 U$20.8 U$20.9 U$20.10 U$20.11 U$20.12 U$20.13 U$20.14 U$20.15 U$20.16 U$20.17 U$20.18 U$20.19 U$20.ANTENNA
ANTENNA3: C89.2 R83.2 U$28.1 U$28.2 U$28.3 U$28.4 U$28.5 U$28.6 U$28.7 U$28.8 U$28.9 U$28.10 U$28.11 U$28.12 U$28.13 U$28.14 U$28.15 U$28.16 U$28.17 U$28.18 U$28.19 U$28.ANTENNA
ANTENNA5: C135.2 R127.2 U$44.1 U$44.2 U$44.3 U$44.4 U$44.5 U$44.6 U$44.7 U$44.8 U$44.9 U$44.10 U$44.11 U$44.12 U$44.13 U$44.14 U$44.15 U$44.16 U$44.17 U$44.18 U$44.19 U$44.ANTENNA
COIL: R36.2 R58.2 R80.2 R124.2 U$1.OUT2 U$11.C1 U$11.C2 U$17.OUT2 U$19.C1 U$19.C2 U$25.OUT2 U$27.C1 U$27.C2 U$41.OUT2 U$43.C1 U$43.C2
DCDC_SW: L5.1 L9.1 L13.1 L21.1 MICROCONTROLLER1.33 MICROCONTROLLER2.33 MICROCONTROLLER3.33 MICROCONTROLLER5.33
GLED: MICROCONTROLLER1.12 MICROCONTROLLER2.12 MICROCONTROLLER3.12 MICROCONTROLLER5.12 R27.2 R49.2 R71.2 R115.2
GND: BALUN1.5 BALUN1.6 BALUN2.5 BALUN2.6 BALUN3.5 BALUN3.6 BALUN5.5 BALUN5.6 C21.2 C24.2 C25.2 C27.2 C28.2 C29.2 C30.2 C31.2 C32.2 C33.2 C34.2 C35.2 C36.2 C37.2 C38.2 C39.2 C40.2 C41.2 C43.1 C44.2 C45.2 C46.2 C47.2 C48.2 C49.2 C50.2 C51.2 C52.2 C53.2 C54.2 C55.2 C56.2 C57.2 C58.2 C59.2 C60.2 C61.2 C62.2 C63.2 C64.2 C66.1 C67.2 C68.2 C69.2 C70.2 C71.2 C72.2 C73.2 C74.2 C75.2 C76.2 C77.2 C78.2 C79.2 C80.2 C81.2 C82.2 C83.2 C84.2 C85.2 C86.2 C87.2 C89.1 C90.2 C91.2 C92.2 C116.2 C117.2 C118.2 C119.2 C120.2 C121.2 C122.2 C123.2 C124.2 C125.2 C126.2 C127.2 C128.2 C129.2 C130.2 C131.2 C132.2 C133.2 C135.1 C136.2 C137.2 C138.2 FRONT_PANEL1.- FRONT_PANEL2.- FRONT_PANEL3.- FRONT_PANEL5.- GPS1.10 GPS1.11 GPS1.15 GPS1.19 GPS1.21 GPS1.22 GPS1.24 GPS1.25 GPS1.27 GPS1.28 GPS1.29 GPS1.31 GPS1.33 GPS1.49 GPS1.60 GPS1.61 GPS1.62 GPS1.64 GPS1.65 GPS1.69 GPS2.10 GPS2.11 GPS2.15 GPS2.19 GPS2.21 GPS2.22 GPS2.24 GPS2.25 GPS2.27 GPS2.28 GPS2.29 GPS2.31 GPS2.33 GPS2.49 GPS2.60 GPS2.61 GPS2.62 GPS2.64 GPS2.65 GPS2.69 GPS3.10 GPS3.11 GPS3.15 GPS3.19 GPS3.21 GPS3.22 GPS3.24 GPS3.25 GPS3.27 GPS3.28 GPS3.29 GPS3.31 GPS3.33 GPS3.49 GPS3.60 GPS3.61 GPS3.62 GPS3.64 GPS3.65 GPS3.69 GPS5.10 GPS5.11 GPS5.15 GPS5.19 GPS5.21 GPS5.22 GPS5.24 GPS5.25 GPS5.27 GPS5.28 GPS5.29 GPS5.31 GPS5.33 GPS5.49 GPS5.60 GPS5.61 GPS5.62 GPS5.64 GPS5.65 GPS5.69 IMU1.14 IMU1.15 IMU1.16 IMU1.17 IMU1.18 IMU1.19 IMU1.20 IMU2.14 IMU2.15 IMU2.16 IMU2.17 IMU2.18 IMU2.19 IMU2.20 IMU3.14 IMU3.15 IMU3.16 IMU3.17 IMU3.18 IMU3.19 IMU3.20 IMU5.14 IMU5.15 IMU5.16 IMU5.17 IMU5.18 IMU5.19 IMU5.20 L6.2 L7.1 L10.2 L11.1 L14.2 L15.1 L22.2 L23.1 LED4.C LED5.C LED7.C LED8.C LED10.C LED11.C LED16.C LED17.C MICROCONTROLLER1.32 MICROCONTROLLER1.49 MICROCONTROLLER2.32 MICROCONTROLLER2.49 MICROCONTROLLER3.32 MICROCONTROLLER3.49 MICROCONTROLLER5.32 MICROCONTROLLER5.49 R29.2 R30.2 R41.2 R51.2 R52.2 R63.2 R73.2 R74.2 R85.2 R117.2 R118.2 R129.2 REAR_PANEL1.- REAR_PANEL2.- REAR_PANEL3.- REAR_PANEL5.- TSX1.2 TSX1.4 TSX2.2 TSX2.4 TSX3.2 TSX3.4 TSX5.2 TSX5.4 U$1.PGND U$1.SGND U$11.GND U$13.GND1 U$13.GND2 U$13.GND3 U$14.GND1 U$14.GND2 U$14.GND3 U$15.6 U$16.1 U$16.FOOT1 U$16.FOOT2 U$16.FOOT3 U$16.FOOT4 U$17.PGND U$17.SGND U$19.GND U$21.GND1 U$21.GND2 U$21.GND3 U$22.GND1 U$22.GND2 U$22.GND3 U$23.6 U$24.1 U$24.FOOT1 U$24.FOOT2 U$24.FOOT3 U$24.FOOT4 U$25.PGND U$25.SGND U$27.GND U$29.GND1 U$29.GND2 U$29.GND3 U$30.GND1 U$30.GND2 U$30.GND3 U$31.6 U$32.1 U$32.FOOT1 U$32.FOOT2 U$32.FOOT3 U$32.FOOT4 U$41.PGND U$41.SGND U$43.GND U$45.GND1 U$45.GND2 U$45.GND3 U$46.GND1 U$46.GND2 U$46.GND3 U$47.6 U$48.1 U$48.FOOT1 U$48.FOOT2 U$48.FOOT3 U$48.FOOT4
GYRO_INT: IMU1.11 IMU2.11 IMU3.11 IMU5.11 MICROCONTROLLER1.19 MICROCONTROLLER2.19 MICROCONTROLLER3.19 MICROCONTROLLER5.19
JTAG_TCKC: MICROCONTROLLER1.25 MICROCONTROLLER2.25 MICROCONTROLLER3.25 MICROCONTROLLER5.25 U$16.14 U$16.15 U$24.14 U$24.15 U$32.14 U$32.15 U$48.14 U$48.15
JTAG_TMSC: MICROCONTROLLER1.24 MICROCONTROLLER2.24 MICROCONTROLLER3.24 MICROCONTROLLER5.24 U$16.16 U$16.17 U$24.16 U$24.17 U$32.16 U$32.17 U$48.16 U$48.17
MAG_INT: IMU1.9 IMU2.9 IMU3.9 IMU5.9 MICROCONTROLLER1.20 MICROCONTROLLER2.20 MICROCONTROLLER3.20 MICROCONTROLLER5.20
N$49: C33.1 MICROCONTROLLER1.23
N$50: 32.1.P2 C34.1 MICROCONTROLLER1.4
N$51: 32.1.P1 C35.1 MICROCONTROLLER1.5
N$52: LED4.A R26.1
N$53: LED5.A R27.1
N$54: C39.1 IMU1.21
N$55: C40.1 IMU1.24
N$56: IMU1.5 IMU1.6 IMU1.7 IMU1.8 R28.2
N$57: GPS1.42 R31.1
N$58: LED6.C R32.2
N$59: GPS1.9 R33.1
N$60: C41.1 GPS1.1 R34.2
N$61: R35.1 U$1.ENA
N$62: R36.1 U$1.OUT1
N$63: BALUN1.4 MICROCONTROLLER1.1
N$64: BALUN1.3 MICROCONTROLLER1.2
N$65: BALUN1.2 MICROCONTROLLER1.3
N$66: BALUN1.1 C42.2
N$67: L6.1 R37.2 R39.1 R43.2
N$68: C42.1 R37.1
N$69: GPS1.32 R38.2
N$70: R38.1 R40.2 R41.1 R44.1
N$71: L7.2 R40.1 U$10.SIG
N$72: R42.1 U$15.5
N$73: L8.1 U$15.7
N$74: R44.2 U$14.SIG
N$75: R43.1 U$13.SIG
N$97: C56.1 MICROCONTROLLER2.23
N$98: 32.2.P2 C57.1 MICROCONTROLLER2.4
N$99: 32.2.P1 C58.1 MICROCONTROLLER2.5
N$100: LED7.A R48.1
N$101: LED8.A R49.1
N$102: C62.1 IMU2.21
N$103: C63.1 IMU2.24
N$104: IMU2.5 IMU2.6 IMU2.7 IMU2.8 R50.2
N$105: GPS2.42 R53.1
N$106: LED9.C R54.2
N$107: GPS2.9 R55.1
N$108: C64.1 GPS2.1 R56.2
N$109: R57.1 U$17.ENA
N$110: R58.1 U$17.OUT1
N$111: BALUN2.4 MICROCONTROLLER2.1
N$112: BALUN2.3 MICROCONTROLLER2.2
N$113: BALUN2.2 MICROCONTROLLER2.3
N$114: BALUN2.1 C65.2
N$115: L10.1 R59.2 R61.1 R65.2
N$116: C65.1 R59.1
N$117: GPS2.32 R60.2
N$118: R60.1 R62.2 R63.1 R66.1
N$119: L11.2 R62.1 U$18.SIG
N$120: R64.1 U$23.5
N$121: L12.1 U$23.7
N$122: R66.2 U$22.SIG
N$123: R65.1 U$21.SIG
N$145: C79.1 MICROCONTROLLER3.23
N$146: 32.3.P2 C80.1 MICROCONTROLLER3.4
N$147: 32.3.P1 C81.1 MICROCONTROLLER3.5
N$148: LED10.A R70.1
N$149: LED11.A R71.1
N$150: C85.1 IMU3.21
N$151: C86.1 IMU3.24
N$152: IMU3.5 IMU3.6 IMU3.7 IMU3.8 R72.2
N$153: GPS3.42 R75.1
N$154: LED12.C R76.2
N$155: GPS3.9 R77.1
N$156: C87.1 GPS3.1 R78.2
N$157: R79.1 U$25.ENA
N$158: R80.1 U$25.OUT1
N$159: BALUN3.4 MICROCONTROLLER3.1
N$160: BALUN3.3 MICROCONTROLLER3.2
N$161: BALUN3.2 MICROCONTROLLER3.3
N$162: BALUN3.1 C88.2
N$163: L14.1 R81.2 R83.1 R87.2
N$164: C88.1 R81.1
N$165: GPS3.32 R82.2
N$166: R82.1 R84.2 R85.1 R88.1
N$167: L15.2 R84.1 U$26.SIG
N$168: R86.1 U$31.5
N$169: L16.1 U$31.7
N$170: R88.2 U$30.SIG
N$171: R87.1 U$29.SIG
N$241: C125.1 MICROCONTROLLER5.23
N$242: 32.5.P2 C126.1 MICROCONTROLLER5.4
N$243: 32.5.P1 C127.1 MICROCONTROLLER5.5
N$244: LED16.A R114.1
N$245: LED17.A R115.1
N$246: C131.1 IMU5.21
N$247: C132.1 IMU5.24
N$248: IMU5.5 IMU5.6 IMU5.7 IMU5.8 R116.2
N$249: GPS5.42 R119.1
N$250: LED18.C R120.2
N$251: GPS5.9 R121.1
N$252: C133.1 GPS5.1 R122.2
N$253: R123.1 U$41.ENA
N$254: R124.1 U$41.OUT1
N$255: BALUN5.4 MICROCONTROLLER5.1
N$256: BALUN5.3 MICROCONTROLLER5.2
N$257: BALUN5.2 MICROCONTROLLER5.3
N$258: BALUN5.1 C134.2
N$259: L22.1 R125.2 R127.1 R131.2
N$260: C134.1 R125.1
N$261: GPS5.32 R126.2
N$262: R126.1 R128.2 R129.1 R132.1
N$263: L23.2 R128.1 U$42.SIG
N$264: R130.1 U$47.5
N$265: L24.1 U$47.7
N$266: R132.2 U$46.SIG
N$267: R131.1 U$45.SIG
NAV: GPS1.7 GPS2.7 GPS3.7 GPS5.7 MICROCONTROLLER1.6 MICROCONTROLLER2.6 MICROCONTROLLER3.6 MICROCONTROLLER5.6 R32.1 R54.1 R76.1 R120.1
PWM1: MICROCONTROLLER1.40 MICROCONTROLLER2.40 MICROCONTROLLER3.40 MICROCONTROLLER5.40 U$1.IN1 U$17.IN1 U$25.IN1 U$41.IN1
PWM2: MICROCONTROLLER1.41 MICROCONTROLLER2.41 MICROCONTROLLER3.41 MICROCONTROLLER5.41 U$1.IN2 U$17.IN2 U$25.IN2 U$41.IN2
RESET: C21.1 C47.1 C70.1 C116.1 MICROCONTROLLER1.35 MICROCONTROLLER2.35 MICROCONTROLLER3.35 MICROCONTROLLER5.35 R23.1 R45.1 R67.1 R111.1 U$16.6 U$16.7 U$24.6 U$24.7 U$32.6 U$32.7 U$48.6 U$48.7
RLED: MICROCONTROLLER1.11 MICROCONTROLLER2.11 MICROCONTROLLER3.11 MICROCONTROLLER5.11 R26.2 R48.2 R70.2 R114.2
RXD: GPS1.44 GPS2.44 GPS3.44 GPS5.44 MICROCONTROLLER1.7 MICROCONTROLLER2.7 MICROCONTROLLER3.7 MICROCONTROLLER5.7 U$16.2 U$16.3 U$24.2 U$24.3 U$32.2 U$32.3 U$48.2 U$48.3
SCL: IMU1.2 IMU2.2 IMU3.2 IMU5.2 MICROCONTROLLER1.9 MICROCONTROLLER2.9 MICROCONTROLLER3.9 MICROCONTROLLER5.9 R24.1 R46.1 R68.1 R112.1
SDA: IMU1.4 IMU2.4 IMU3.4 IMU5.4 MICROCONTROLLER1.10 MICROCONTROLLER2.10 MICROCONTROLLER3.10 MICROCONTROLLER5.10 R25.1 R47.1 R69.1 R113.1
SOLAR_CELLS: C45.1 C68.1 C91.1 C137.1 FRONT_PANEL1.+ FRONT_PANEL2.+ FRONT_PANEL3.+ FRONT_PANEL5.+ L8.2 L12.2 L16.2 L24.2 R42.2 R64.2 R86.2 R130.2 REAR_PANEL1.+ REAR_PANEL2.+ REAR_PANEL3.+ REAR_PANEL5.+
SWO: MICROCONTROLLER1.28 MICROCONTROLLER2.28 MICROCONTROLLER3.28 MICROCONTROLLER5.28 U$16.8 U$16.9 U$24.8 U$24.9 U$32.8 U$32.9 U$48.8 U$48.9
TDI: MICROCONTROLLER1.27 MICROCONTROLLER2.27 MICROCONTROLLER3.27 MICROCONTROLLER5.27 U$16.10 U$16.11 U$24.10 U$24.11 U$32.10 U$32.11 U$48.10 U$48.11
TDO: MICROCONTROLLER1.26 MICROCONTROLLER2.26 MICROCONTROLLER3.26 MICROCONTROLLER5.26 U$16.12 U$16.13 U$24.12 U$24.13 U$32.12 U$32.13 U$48.12 U$48.13
TXD: MICROCONTROLLER1.8 MICROCONTROLLER2.8 MICROCONTROLLER3.8 MICROCONTROLLER5.8 R31.2 R53.2 R75.2 R119.2 U$16.4 U$16.5 U$24.4 U$24.5 U$32.4 U$32.5 U$48.4 U$48.5
VDDR: C30.1 C31.1 C32.1 C53.1 C54.1 C55.1 C76.1 C77.1 C78.1 C122.1 C123.1 C124.1 L5.2 L9.2 L13.2 L21.2 MICROCONTROLLER1.45 MICROCONTROLLER1.48 MICROCONTROLLER2.45 MICROCONTROLLER2.48 MICROCONTROLLER3.45 MICROCONTROLLER3.48 MICROCONTROLLER5.45 MICROCONTROLLER5.48
VDDS: C24.1 C25.1 C27.1 C28.1 C29.1 C36.1 C37.1 C38.1 C44.1 C46.1 C48.1 C49.1 C50.1 C51.1 C52.1 C59.1 C60.1 C61.1 C67.1 C69.1 C71.1 C72.1 C73.1 C74.1 C75.1 C82.1 C83.1 C84.1 C90.1 C92.1 C117.1 C118.1 C119.1 C120.1 C121.1 C128.1 C129.1 C130.1 C136.1 C138.1 GPS1.2 GPS1.18 GPS1.58 GPS2.2 GPS2.18 GPS2.58 GPS3.2 GPS3.18 GPS3.58 GPS5.2 GPS5.18 GPS5.58 IMU1.1 IMU1.3 IMU1.22 IMU1.23 IMU2.1 IMU2.3 IMU2.22 IMU2.23 IMU3.1 IMU3.3 IMU3.22 IMU3.23 IMU5.1 IMU5.3 IMU5.22 IMU5.23 LED6.A LED9.A LED12.A LED18.A LS3.C LS4.C LS5.C LS6.C LS7.C LS8.C LS11.C LS12.C MICROCONTROLLER1.13 MICROCONTROLLER1.22 MICROCONTROLLER1.34 MICROCONTROLLER1.44 MICROCONTROLLER2.13 MICROCONTROLLER2.22 MICROCONTROLLER2.34 MICROCONTROLLER2.44 MICROCONTROLLER3.13 MICROCONTROLLER3.22 MICROCONTROLLER3.34 MICROCONTROLLER3.44 MICROCONTROLLER5.13 MICROCONTROLLER5.22 MICROCONTROLLER5.34 MICROCONTROLLER5.44 R23.2 R24.2 R25.2 R28.1 R33.2 R34.1 R35.2 R45.2 R46.2 R47.2 R50.1 R55.2 R56.1 R57.2 R67.2 R68.2 R69.2 R72.1 R77.2 R78.1 R79.2 R111.2 R112.2 R113.2 R116.1 R121.2 R122.1 R123.2 U$1.VCC U$1.VM U$11.VCC U$15.1 U$15.8 U$16.18 U$16.19 U$17.VCC U$17.VM U$19.VCC U$23.1 U$23.8 U$24.18 U$24.19 U$25.VCC U$25.VM U$27.VCC U$31.1 U$31.8 U$32.18 U$32.19 U$41.VCC U$41.VM U$43.VCC U$47.1 U$47.8 U$48.18 U$48.19
X24M_N: MICROCONTROLLER1.46 MICROCONTROLLER2.46 MICROCONTROLLER3.46 MICROCONTROLLER5.46 TSX1.3 TSX2.3 TSX3.3 TSX5.3
X24M_P: MICROCONTROLLER1.47 MICROCONTROLLER2.47 MICROCONTROLLER3.47 MICROCONTROLLER5.47 TSX1.1 TSX2.1 TSX3.1 TSX5.1

## Tracks (layer width: path | path; a pad name or v marks a point on that pad's centre or on a via)
ACCEL_INT  (3 unrouted)
  Top 0.152: MICROCONTROLLER1.18 579.17,3.41 578.32,2.55 565.08,2.55 564.89,2.75 564.89,3.21 565.02,3.34 565.27,3.34 IMU1.12 | MICROCONTROLLER3.18 596.36,578.99 597.21,578.13 597.21,564.89 597.02,564.7 596.56,564.7 596.42,564.83 596.42,565.09 IMU3.12 | MICROCONTROLLER2.18 20.65,596.13 21.5,596.99 34.74,596.99 34.94,596.79 34.94,596.34 34.8,596.2 34.55,596.2 IMU2.12 | MICROCONTROLLER5.18 3.27,21.37 2.42,22.22 2.42,35.46 2.61,35.66 3.07,35.66 3.21,35.52 3.21,35.27 IMU5.12
ADC0  (via drill 0.35)  (3 unrouted)
  Top 0.152: MICROCONTROLLER1.36 584.01,18.41 v584.34,18.73 | MICROCONTROLLER3.36 581.35,583.83 v581.03,584.15 | MICROCONTROLLER2.36 15.81,581.13 v15.49,580.81 | MICROCONTROLLER5.36 18.28,16.53 v18.6,16.21
  Bottom 0.152: 584.08,18.47 v584.34,18.73 582.99,17.38 LS3.E 581.65,15.94 arc-90 R29.1 | 581.29,583.89 v581.03,584.15 582.38,582.8 LS7.E 583.82,581.47 arc-90 R73.1 | 15.75,581.07 v15.49,580.81 16.84,582.16 LS5.E 18.17,583.6 arc-90 R51.1 | 18.34,16.47 v18.6,16.21 17.25,17.56 LS11.E 15.81,18.89 arc-90 R117.1
ADC1  (3 unrouted)
  Top 0.152: MICROCONTROLLER1.37 582.45,19.01 R30.1 583.29,19.85 LS4.E | MICROCONTROLLER3.37 580.75,582.26 R74.1 579.91,583.1 LS8.E | MICROCONTROLLER2.37 17.38,580.53 R52.1 16.54,579.69 LS6.E | MICROCONTROLLER5.37 18.88,18.09 R118.1 19.72,17.25 LS12.E
ANTENNA1
  Top 0.152: 564.67,21.19 564.76,21.21
  Top 0.254: R39.2 564.67,21.19
  Top 0.508: 564.76,21.21 564.76,22.49 C43.2
  Top 1.016: U$12.2 U$12.3 | U$12.4 U$12.5 | U$12.6 U$12.7 | U$12.8 U$12.9 | U$12.10 U$12.11 | U$12.12 U$12.13 | U$12.14 U$12.15 | U$12.16 U$12.17 | U$12.18 U$12.19 | U$12.1 U$12.ANTENNA R39.2 564.62,21.14
  Bottom 1.016: U$12.1 551.8,20.15 555.76,20.15 U$12.2 | U$12.3 551.78,18.13 555.78,18.13 U$12.4 | U$12.5 551.8,16.11 555.83,16.11 556.77,15.17 U$12.6 | U$12.7 551.76,14.15 555.77,14.15 U$12.8 | U$12.9 551.79,12.12 555.81,12.12 556.77,11.16 U$12.10 | U$12.11 551.78,10.13 555.78,10.13 U$12.12 | U$12.12 | U$12.13 551.77,8.14 555.78,8.14 U$12.14 | U$12.15 551.78,6.13 555.79,6.13 U$12.16 | U$12.17 551.81,4.11 555.83,4.11 556.77,3.17 U$12.18
ANTENNA2
  Top 0.152: 35.16,578.35 35.06,578.33
  Top 0.254: R61.2 35.16,578.35
  Top 0.508: 35.06,578.33 35.06,577.05 C66.2
  Top 1.016: U$20.2 U$20.3 | U$20.4 U$20.5 | U$20.6 U$20.7 | U$20.8 U$20.9 | U$20.10 U$20.11 | U$20.12 U$20.13 | U$20.14 U$20.15 | U$20.16 U$20.17 | U$20.18 U$20.19 | U$20.1 U$20.ANTENNA R61.2 35.21,578.4
  Bottom 1.016: U$20.1 48.03,579.39 44.06,579.39 U$20.2 | U$20.3 48.04,581.41 44.04,581.41 U$20.4 | U$20.5 48.02,583.43 44,583.43 43.06,584.37 U$20.6 | U$20.7 48.06,585.39 44.06,585.39 U$20.8 | U$20.9 48.03,587.42 44.02,587.42 43.06,588.38 U$20.10 | U$20.11 48.05,589.41 44.05,589.41 U$20.12 | U$20.12 | U$20.13 48.05,591.4 44.04,591.4 U$20.14 | U$20.15 48.04,593.41 44.03,593.41 U$20.16 | U$20.17 48.02,595.44 43.99,595.44 43.06,596.37 U$20.18
ANTENNA3
  Top 0.152: 578.57,564.48 578.55,564.58
  Top 0.254: R83.2 578.57,564.48
  Top 0.508: 578.55,564.58 577.27,564.58 C89.2
  Top 1.016: U$28.2 U$28.3 | U$28.4 U$28.5 | U$28.6 U$28.7 | U$28.8 U$28.9 | U$28.10 U$28.11 | U$28.12 U$28.13 | U$28.14 U$28.15 | U$28.16 U$28.17 | U$28.18 U$28.19 | U$28.1 U$28.ANTENNA R83.2 578.62,564.43
  Bottom 1.016: U$28.1 579.61,551.61 579.61,555.58 U$28.2 | U$28.3 581.63,551.6 581.63,555.6 U$28.4 | U$28.5 583.65,551.62 583.65,555.64 584.59,556.58 U$28.6 | U$28.7 585.61,551.58 585.61,555.58 U$28.8 | U$28.9 587.64,551.6 587.64,555.62 588.6,556.58 U$28.10 | U$28.11 589.63,551.59 589.63,555.59 U$28.12 | U$28.12 | U$28.13 591.62,551.59 591.62,555.6 U$28.14 | U$28.15 593.63,551.6 593.63,555.61 U$28.16 | U$28.17 595.66,551.62 595.66,555.64 596.59,556.58 U$28.18
ANTENNA5
  Top 0.152: 21.06,35.87 21.08,35.78
  Top 0.254: R127.2 21.06,35.87
  Top 0.508: 21.08,35.78 22.36,35.78 C135.2
  Top 1.016: U$44.2 U$44.3 | U$44.4 U$44.5 | U$44.6 U$44.7 | U$44.8 U$44.9 | U$44.10 U$44.11 | U$44.12 U$44.13 | U$44.14 U$44.15 | U$44.16 U$44.17 | U$44.18 U$44.19 | U$44.1 U$44.ANTENNA 21.02,37.27 R127.2 21.01,35.92
  Bottom 1.016: U$44.1 20.02,48.74 20.02,44.78 U$44.2 | U$44.3 18,48.76 18,44.76 U$44.4 | U$44.5 15.98,48.74 15.98,44.72 15.04,43.78 U$44.6 | U$44.7 14.02,48.78 14.02,44.77 U$44.8 | U$44.9 11.99,48.75 11.99,44.73 11.03,43.78 U$44.10 | U$44.11 10,48.76 10,44.76 U$44.12 | U$44.12 | U$44.13 8.01,48.77 8.01,44.76 U$44.14 | U$44.15 6,48.76 6,44.75 U$44.16 | U$44.17 3.97,48.73 3.97,44.71 3.04,43.78 U$44.18
COIL  (via drill 0.35)  (3 unrouted)
  Route2 0.152: v592.75,26.52 592.75,24.83 592.75,14.09 585.41,6.75 571.74,6.75 571.69,6.75 565.4,10.3 565.41,10.96 | 565.41,10.96 565.4,10.97 | 565.41,10.96 565.41,24.71 563.28,26.84 560.68,26.84 555.48,32.04 555.48,43.82 557.65,45.99 | 557.65,45.99 557.73,46.07 | 557.65,45.99 591.43,45.99 593.54,43.88 593.54,14.24 585.53,6.23 571.79,6.23 564.86,10.05 564.89,24.52 563.11,26.3 560.58,26.3 554.91,31.97 554.91,43.95 557.48,46.52 591.53,46.52 594.14,43.91 594.14,14.19 585.6,5.65 571.95,5.64 564.36,9.84 564.36,24.34 562.92,25.79 560.38,25.79 554.28,31.89 554.28,44.09 557.26,47.07 591.76,47.07 594.87,43.96 594.87,14.26 585.7,5.08 571.98,5.11 563.81,9.65 563.79,24.12 562.68,25.23 560.1,25.23 553.59,31.74 553.59,44.32 557.05,47.78 592.05,47.78 595.59,44.1 595.59,14.3 585.76,4.47 573.65,4.47 v573.13,3.95 | v573.24,592.56 574.94,592.57 585.67,592.57 593.01,585.22 593.01,571.55 593.01,571.51 589.46,565.22 588.8,565.23 | 588.8,565.23 588.79,565.22 | 588.8,565.23 575.05,565.23 572.92,563.1 572.92,560.49 567.72,555.29 555.94,555.29 553.77,557.46 | 553.77,557.46 553.7,557.54 | 553.77,557.46 553.77,591.24 555.89,593.35 585.52,593.35 593.53,585.34 593.53,571.6 589.71,564.68 575.24,564.7 573.47,562.92 573.47,560.39 567.8,554.72 555.81,554.72 553.24,557.29 553.24,591.35 555.85,593.96 585.57,593.96 594.11,585.41 594.12,571.76 589.92,564.18 575.42,564.18 573.97,562.73 573.97,560.2 567.87,554.09 555.67,554.09 552.69,557.07 552.69,591.58 555.8,594.68 585.51,594.68 594.68,585.51 594.65,571.79 590.12,563.62 575.64,563.61 574.53,562.49 574.53,559.91 568.02,553.4 555.44,553.4 551.99,556.86 551.99,591.87 555.66,595.4 585.46,595.4 595.29,585.57 595.29,573.46 v595.81,572.94
  Route2 0.152: v7.08,573.02 7.07,574.72 7.07,585.45 14.42,592.79 28.09,592.79 28.13,592.79 34.42,589.24 34.41,588.58 | 34.41,588.58 34.42,588.57 | 34.41,588.58 34.41,574.83 36.54,572.7 39.15,572.7 44.34,567.5 44.34,555.72 42.18,553.55 | 42.18,553.55 42.1,553.48 | 42.18,553.55 8.4,553.55 6.29,555.66 6.29,585.3 14.3,593.31 28.03,593.31 34.96,589.49 34.94,575.02 36.72,573.24 39.25,573.24 44.92,567.58 44.92,555.59 42.35,553.02 8.29,553.02 5.68,555.63 5.68,585.35 14.22,593.89 27.88,593.9 35.46,589.7 35.46,575.2 36.91,573.75 39.44,573.75 45.55,567.65 45.55,555.45 42.56,552.47 8.06,552.47 4.95,555.58 4.95,585.29 14.13,594.46 27.84,594.43 36.02,589.89 36.03,575.42 37.14,574.31 39.73,574.31 46.23,567.8 46.23,555.22 42.78,551.76 7.77,551.76 4.24,555.44 4.24,585.24 14.07,595.07 26.18,595.07 v26.7,595.59 | v26.39,7.8 24.69,7.79 13.96,7.79 6.62,15.13 6.62,28.8 6.62,28.85 10.17,35.14 10.83,35.13 | 10.83,35.13 10.84,35.14 | 10.83,35.13 24.58,35.13 26.71,37.26 26.71,39.86 31.91,45.06 43.69,45.06 45.86,42.89 | 45.86,42.89 45.93,42.82 | 45.86,42.89 45.86,9.12 43.74,7 14.11,7 6.1,15.01 6.1,28.75 9.92,35.68 24.39,35.66 26.16,37.43 26.16,39.96 31.83,45.63 43.82,45.63 46.39,43.06 46.39,9.01 43.78,6.4 14.06,6.4 5.52,14.94 5.5,28.59 9.71,36.18 24.21,36.18 25.66,37.62 25.66,40.16 31.76,46.26 43.96,46.26 46.94,43.28 46.94,8.78 43.83,5.67 14.12,5.67 4.95,14.85 4.98,28.56 9.51,36.74 23.99,36.75 25.1,37.86 25.1,40.44 31.61,46.95 44.19,46.95 47.65,43.49 47.65,8.49 43.97,4.96 14.17,4.96 4.34,14.79 4.34,26.89 v3.82,27.41
  Route15 0.152: v578.51,26.05 578.51,26.51 580.2,28.19 591.88,28.19 592.94,29.26 592.94,43.65 590.6,46 557.7,46 555.48,43.77 555.48,32.15 560.79,26.84 563.29,26.84 565.4,24.73 565.4,10.37 571.7,6.76 585.41,6.74 593.55,14.88 593.55,43.86 590.88,46.53 557.49,46.53 554.9,43.95 554.9,31.98 560.58,26.3 563.11,26.3 564.86,24.55 564.87,10.06 571.8,6.23 585.53,6.23 594.14,14.85 594.14,43.9 590.97,47.07 557.27,47.07 554.28,44.08 554.28,31.9 560.38,25.79 562.91,25.79 564.36,24.35 564.36,9.85 571.95,5.64 585.53,5.65 594.87,14.99 594.87,43.96 591.06,47.78 557.05,47.78 553.59,44.33 553.59,31.74 560.1,25.24 562.69,25.23 563.79,24.12 563.81,9.64 572.01,5.08 585.71,5.08 595.59,14.96 595.59,44.12 591.29,48.42 556.86,48.42 552.88,44.44 552.88,31.64 559.79,24.73 562.53,24.73 563.24,24.02 563.24,9.47 v573.13,3.95 | v573.71,578.33 573.25,578.33 571.57,580.01 571.57,591.69 570.51,592.75 556.11,592.75 553.77,590.41 553.77,557.51 555.99,555.29 567.61,555.29 572.92,560.6 572.92,563.1 575.04,565.22 589.39,565.22 593.01,571.51 593.02,585.22 584.88,593.36 555.9,593.36 553.23,590.69 553.23,557.3 555.82,554.72 567.78,554.72 573.46,560.39 573.46,562.92 575.21,564.67 589.71,564.68 593.53,571.61 593.53,585.34 584.92,593.96 555.87,593.96 552.69,590.78 552.69,557.08 555.68,554.09 567.86,554.09 573.97,560.2 573.97,562.73 575.42,564.17 589.91,564.18 594.12,571.76 594.11,585.34 584.77,594.68 555.8,594.68 551.99,590.87 551.99,556.86 555.44,553.4 568.02,553.4 574.52,559.91 574.53,562.5 575.64,563.61 590.12,563.62 594.68,571.82 594.68,585.52 584.8,595.4 555.64,595.4 551.34,591.1 551.34,556.67 555.32,552.69 568.13,552.69 575.03,559.6 575.03,562.35 575.74,563.06 590.3,563.06 v595.81,572.94
  Route15 0.152: v21.31,573.49 21.31,573.03 19.63,571.35 7.95,571.35 6.88,570.28 6.88,555.89 9.23,553.54 42.13,553.54 44.35,555.77 44.35,567.39 39.04,572.7 36.54,572.7 34.42,574.82 34.42,589.17 28.13,592.78 14.42,592.8 6.28,584.66 6.28,555.68 8.95,553.01 42.34,553.01 44.92,555.6 44.92,567.56 39.24,573.24 36.72,573.24 34.97,574.99 34.96,589.48 28.03,593.31 14.3,593.31 5.68,584.7 5.68,555.64 8.86,552.47 42.56,552.47 45.55,555.46 45.55,567.64 39.44,573.75 36.91,573.75 35.47,575.2 35.46,589.69 27.87,593.9 14.3,593.89 4.95,584.55 4.95,555.58 8.77,551.76 42.78,551.76 46.23,555.22 46.24,567.8 39.73,574.3 37.14,574.31 36.03,575.42 36.02,589.9 27.82,594.46 14.12,594.46 4.24,584.58 4.24,555.42 8.53,551.12 42.97,551.12 46.95,555.1 46.95,567.91 40.04,574.81 37.29,574.81 36.58,575.52 36.58,590.08 v26.7,595.59 | v25.92,22.03 26.38,22.03 28.06,20.35 28.06,8.67 29.12,7.6 43.52,7.6 45.86,9.94 45.86,42.84 43.64,45.06 32.02,45.06 26.71,39.75 26.71,37.25 24.59,35.14 10.24,35.14 6.62,28.85 6.61,15.14 14.75,7 43.73,7 46.4,9.67 46.4,43.06 43.81,45.64 31.85,45.64 26.17,39.96 26.17,37.43 24.42,35.69 9.92,35.67 6.1,28.74 6.1,15.02 14.71,6.4 43.76,6.4 46.94,9.57 46.94,43.27 43.95,46.27 31.77,46.27 25.66,40.16 25.66,37.63 24.21,36.19 9.72,36.18 5.5,28.59 5.52,15.02 14.86,5.67 43.83,5.67 47.65,9.49 47.65,43.49 44.19,46.95 31.61,46.96 25.11,40.45 25.1,37.86 23.99,36.75 9.51,36.74 4.95,28.53 4.95,14.83 14.83,4.95 43.99,4.95 48.29,9.25 48.29,43.69 44.31,47.66 31.5,47.66 24.59,40.76 24.59,38.01 23.89,37.3 9.33,37.3 v3.82,27.41
  Bottom 0.152: 579.47,26.05 579.47,25.88 581.09,24.26 U$1.OUT2 | 579.47,26.05 579.47,26.38 579.82,26.74 580.47,26.74 582.59,24.62 584.32,24.62 584.67,24.28 584.67,24.22 U$11.C2 | 579.47,26.05 v578.51,26.05 | 592.63,26.51 v592.75,26.52 v592.74,26.52 591.1,26.52 589.8,25.21 U$11.C1 587.2,25.31 586.47,26.04 584.89,26.04 R36.2 | 573.71,579.28 573.88,579.28 575.5,580.9 U$25.OUT2 | 573.71,579.28 573.38,579.28 573.02,579.64 573.02,580.28 575.14,582.4 575.14,584.14 575.48,584.48 575.54,584.48 U$27.C2 | 573.71,579.28 v573.71,578.33 | 573.26,592.45 v573.24,592.56 v573.25,592.55 573.25,590.91 574.55,589.61 U$27.C1 574.45,587.01 573.72,586.28 573.72,584.7 R80.2 | 20.36,573.49 20.36,573.66 18.74,575.28 U$17.OUT2 | 20.36,573.49 20.36,573.16 20,572.8 19.35,572.8 17.24,574.92 15.5,574.92 15.16,575.26 15.16,575.32 U$19.C2 | 20.36,573.49 v21.31,573.49 | 7.19,573.03 v7.08,573.02 v7.09,573.02 8.72,573.02 10.03,574.33 U$19.C1 12.63,574.23 13.36,573.5 14.94,573.5 R58.2 | 25.92,21.07 25.75,21.07 24.13,19.45 U$41.OUT2 | 25.92,21.07 26.25,21.07 26.61,20.72 26.61,20.07 24.49,17.96 24.49,16.22 24.15,15.88 24.09,15.88 U$43.C2 | 25.92,21.07 v25.92,22.03 | 26.37,7.91 v26.39,7.8 v26.38,7.81 26.38,9.44 25.08,10.75 U$43.C1 25.18,13.34 25.91,14.07 25.91,15.65 R124.2
DCDC_SW  (via drill 0.35)  (3 unrouted)
  Top 0.152: 583.02,16.91 MICROCONTROLLER1.33 584.51,16.91 v584.79,16.63 | L5.1 582.55,21.84 v583.2,22.49 | 582.85,582.83 MICROCONTROLLER3.33 582.85,584.33 v583.13,584.61 | L13.1 577.92,582.36 v577.27,583.01 | 16.81,582.63 MICROCONTROLLER2.33 15.31,582.63 v15.03,582.91 | L9.1 17.27,577.7 v16.63,577.05 | 16.78,17.52 MICROCONTROLLER5.33 16.78,16.03 v16.5,15.75 | L21.1 21.71,17.99 v22.36,17.35
  Route2 0.152: v584.79,16.63 584.79,18.33 584.94,18.48 584.94,20.74 v583.2,22.49 | v583.13,584.61 581.43,584.61 581.28,584.75 579.02,584.75 v577.27,583.01 | v15.03,582.91 15.03,581.21 14.88,581.06 14.88,578.8 v16.63,577.05 | v16.5,15.75 18.2,15.75 18.35,15.6 20.61,15.6 v22.36,17.35
  Bottom 0.152: v583.2,22.49 583.33,22.54 | v584.79,16.63 585.15,16.63 | v577.27,583.01 577.22,583.14 | v583.13,584.61 583.13,584.96 | v16.63,577.05 16.5,577 | v15.03,582.91 14.68,582.91 | v22.36,17.35 22.41,17.22 | v16.5,15.75 16.5,15.39
GLED  (3 unrouted)
  Top 0.152: R27.2 575.09,11.92 MICROCONTROLLER1.12 | R71.2 587.84,574.9 MICROCONTROLLER3.12 | R49.2 24.74,587.62 MICROCONTROLLER2.12 | R115.2 11.79,25.46 MICROCONTROLLER5.12
GND  (via drill 0.35)  (63 unrouted)
  Top 0.152: MICROCONTROLLER1.49 580.17,16.41 | TSX1.4 TSX1.2 575.22,23.15 574.04,21.98 573.16,21.98 572.8,21.62 572.8,20.52 574.03,19.29 BALUN1.6 BALUN1.5 | MICROCONTROLLER1.32 583.86,16.41 v584.8,15.56 | IMU1.18 567.9,3.09 568.11,3.09 568.17,3.15 568.17,3.23 568.11,3.29 567.9,3.29 IMU1.19 | IMU1.14 566.03,3.12 566.03,3.32 566.09,3.38 566.18,3.38 566.24,3.32 566.24,3.12 IMU1.15 566.46,3.12 566.46,3.32 566.52,3.38 566.61,3.38 566.67,3.32 566.67,3.12 IMU1.16 566.89,3.12 566.89,3.32 566.95,3.38 567.04,3.38 567.1,3.32 567.1,3.12 IMU1.17 567.32,3.12 567.32,3.32 567.38,3.38 567.77,3.38 IMU1.19 | IMU1.19 567.68,3.52 567.52,3.52 567.46,3.58 567.46,3.66 567.52,3.72 567.68,3.72 IMU1.20 567.86,3.9 569.92,3.9 573.79,7.5 v578.36,7.5 | C21.2 588.33,17.79 v589.02,17.33 | v575.22,24.8 576.42,24.8 576.94,24.28 577.96,24.28 C32.2 | C35.2 566.95,15.1 566.57,14.72 566.58,14.73 v566.16,14.3 | 573.11,9.36 573.11,8.49 v572.7,7.96 | C31.2 v580.08,26.13 | U$13.GND1 567.03,25.47 U$13.GND2 568.43,25.47 U$13.GND3 | R30.2 583.93,20.48 584.98,20.48 585.19,20.27 585.19,19.01 585.33,18.88 586.52,18.88 586.55,18.85 | C33.2 587.36,10.94 v587.79,11.37 v587.79,11.36 588.99,11.36 592.49,14.85 U$16.FOOT1 U$16.FOOT3 | U$16.FOOT2 593.07,20.55 592.65,20.14 U$16.1 591.32,19.5 589.57,21.25 589.57,22.25 C45.2 | U$16.FOOT4 U$16.FOOT2 | C46.2 593.99,20.63 U$16.FOOT2 | MICROCONTROLLER3.49 583.35,579.99 | TSX3.4 TSX3.2 576.62,575.03 577.79,573.86 577.79,572.97 578.14,572.61 579.24,572.61 580.47,573.85 BALUN3.6 BALUN3.5 | MICROCONTROLLER3.32 583.35,583.68 v584.21,584.61 | IMU3.18 596.67,567.72 596.67,567.92 596.61,567.98 596.53,567.98 596.47,567.92 596.47,567.72 IMU3.19
  Top 0.152: IMU3.14 596.64,565.85 596.44,565.85 596.38,565.91 596.38,565.99 596.44,566.05 596.64,566.05 IMU3.15 596.64,566.28 596.44,566.28 596.38,566.34 596.38,566.42 596.44,566.48 596.64,566.48 IMU3.16 596.64,566.71 596.44,566.71 596.38,566.77 596.38,566.85 596.44,566.91 596.64,566.91 IMU3.17 596.64,567.14 596.44,567.14 596.38,567.2 596.38,567.58 IMU3.19 | IMU3.19 596.24,567.49 596.24,567.34 596.18,567.28 596.1,567.28 596.04,567.34 596.04,567.49 IMU3.20 595.86,567.67 595.87,569.74 592.26,573.6 v592.27,578.18 | C70.2 581.97,588.14 v582.43,588.83 | v574.96,575.03 574.96,576.23 575.48,576.75 575.48,577.77 C78.2 | C81.2 584.66,566.76 585.04,566.38 585.03,566.39 v585.46,565.97 | 590.4,572.92 591.27,572.92 v591.8,572.52 | C77.2 v573.63,579.89 | U$29.GND1 574.3,566.84 U$29.GND2 574.3,568.24 U$29.GND3 | R74.2 579.28,583.74 579.28,584.79 579.5,585.01 580.75,585.01 580.88,585.14 580.88,586.33 580.91,586.36 | C79.2 588.83,587.17 v588.4,587.6 v588.4,587.61 588.4,588.81 584.91,592.3 U$32.FOOT1 U$32.FOOT3 | U$32.FOOT2 579.21,592.88 579.62,592.47 U$32.1 580.26,591.13 578.51,589.38 577.51,589.38 C91.2 | U$32.FOOT4 U$32.FOOT2 | C92.2 579.14,593.81 U$32.FOOT2 | MICROCONTROLLER2.49 19.65,583.13 | TSX2.4 TSX2.2 24.61,576.39 25.78,577.57 26.67,577.57 27.02,577.92 27.02,579.02 25.79,580.25 BALUN2.6 BALUN2.5 | MICROCONTROLLER2.32 15.96,583.13 v15.03,583.99 | IMU2.18 31.92,596.45 31.72,596.45 31.66,596.39 31.66,596.31 31.72,596.25 31.92,596.25 IMU2.19 | IMU2.14 33.79,596.42 33.79,596.22 33.73,596.16 33.65,596.16 33.59,596.22 33.59,596.42 IMU2.15 33.36,596.42 33.36,596.22 33.3,596.16 33.22,596.16 33.16,596.22 33.16,596.42 IMU2.16 32.93,596.42 32.93,596.22 32.87,596.16 32.79,596.16 32.73,596.22 32.73,596.42 IMU2.17 32.5,596.42 32.5,596.22 32.44,596.16 32.06,596.16 IMU2.19
  Top 0.152: IMU2.19 32.15,596.02 32.3,596.02 32.36,595.96 32.36,595.88 32.3,595.82 32.15,595.82 IMU2.20 31.97,595.64 29.9,595.64 26.04,592.04 v21.46,592.05 | C47.2 11.5,581.75 v10.8,582.21 | v24.61,574.74 23.41,574.74 22.89,575.26 21.86,575.26 C55.2 | C58.2 32.88,584.44 33.26,584.82 33.25,584.81 v33.66,585.24 | 26.71,590.18 26.71,591.05 v27.12,591.58 | C54.2 v19.75,573.41 | U$21.GND1 32.8,574.08 U$21.GND2 31.4,574.08 U$21.GND3 | R52.2 15.9,579.06 14.85,579.06 14.63,579.28 14.63,580.53 14.5,580.66 13.31,580.66 13.28,580.69 | C56.2 12.47,588.61 v12.04,588.17 v12.03,588.18 10.83,588.18 7.34,584.69 U$24.FOOT1 U$24.FOOT3 | U$24.FOOT2 6.76,578.99 7.17,579.4 U$24.1 8.51,580.04 10.26,578.29 10.26,577.29 C68.2 | U$24.FOOT4 U$24.FOOT2 | C69.2 5.83,578.91 U$24.FOOT2 | MICROCONTROLLER5.49 16.28,20.37 | TSX5.4 TSX5.2 23.01,25.33 21.84,26.5 21.84,27.39 21.49,27.74 20.39,27.74 19.16,26.51 BALUN5.6 BALUN5.5 | MICROCONTROLLER5.32 16.28,16.68 v15.42,15.74 | IMU5.18 2.96,32.64 2.96,32.44 3.02,32.38 3.1,32.38 3.16,32.44 3.16,32.64 IMU5.19 | IMU5.14 2.99,34.51 3.19,34.51 3.25,34.45 3.25,34.37 3.19,34.31 2.99,34.31 IMU5.15 2.99,34.08 3.19,34.08 3.25,34.02 3.25,33.94 3.19,33.88 2.99,33.88 IMU5.16 2.99,33.65 3.19,33.65 3.25,33.59 3.25,33.51 3.19,33.45 2.99,33.45 IMU5.17 2.99,33.22 3.19,33.22 3.25,33.16 3.25,32.78 IMU5.19 | IMU5.19 3.39,32.87 3.39,33.02 3.45,33.08 3.53,33.08 3.59,33.02 3.59,32.87 IMU5.20 3.77,32.69 3.77,30.62 7.37,26.75 v7.36,22.18 | C116.2 17.66,12.21 v17.2,11.52 | v24.67,25.33 24.67,24.12 24.15,23.6 24.15,22.58 C124.2 | C127.2 14.97,33.59 14.59,33.97 14.6,33.97 v14.17,34.38
  Top 0.152: 9.23,27.43 8.36,27.43 v7.83,27.84 | C123.2 v26,20.47 | U$45.GND1 25.33,33.52 U$45.GND2 25.33,32.12 U$45.GND3 | R118.2 20.35,16.61 20.35,15.56 20.13,15.35 18.88,15.35 18.75,15.21 18.75,14.03 18.71,13.99 | C125.2 10.8,13.18 v11.23,12.75 11.23,11.55 14.72,8.06 U$48.FOOT1 U$48.FOOT3 | U$48.FOOT2 20.42,7.47 20,7.89 U$48.1 19.37,9.23 21.12,10.98 22.11,10.98 C137.2 | U$48.FOOT4 U$48.FOOT2 | C138.2 20.49,6.55 U$48.FOOT2